# Altium PCB MotorBoard.PcbDoc (part 1 of 2)
Units mm, origin at the board's own origin, x right, y up, seen from the top; angles counter-clockwise.
Board outline 65.2 x 61.84 mm, 4 copper layers (Top Layer, Layer 1, Layer 2, Bottom Layer), stack 1.57 mm thick; 110 components, 72 nets, 437 pads, 238 vias.
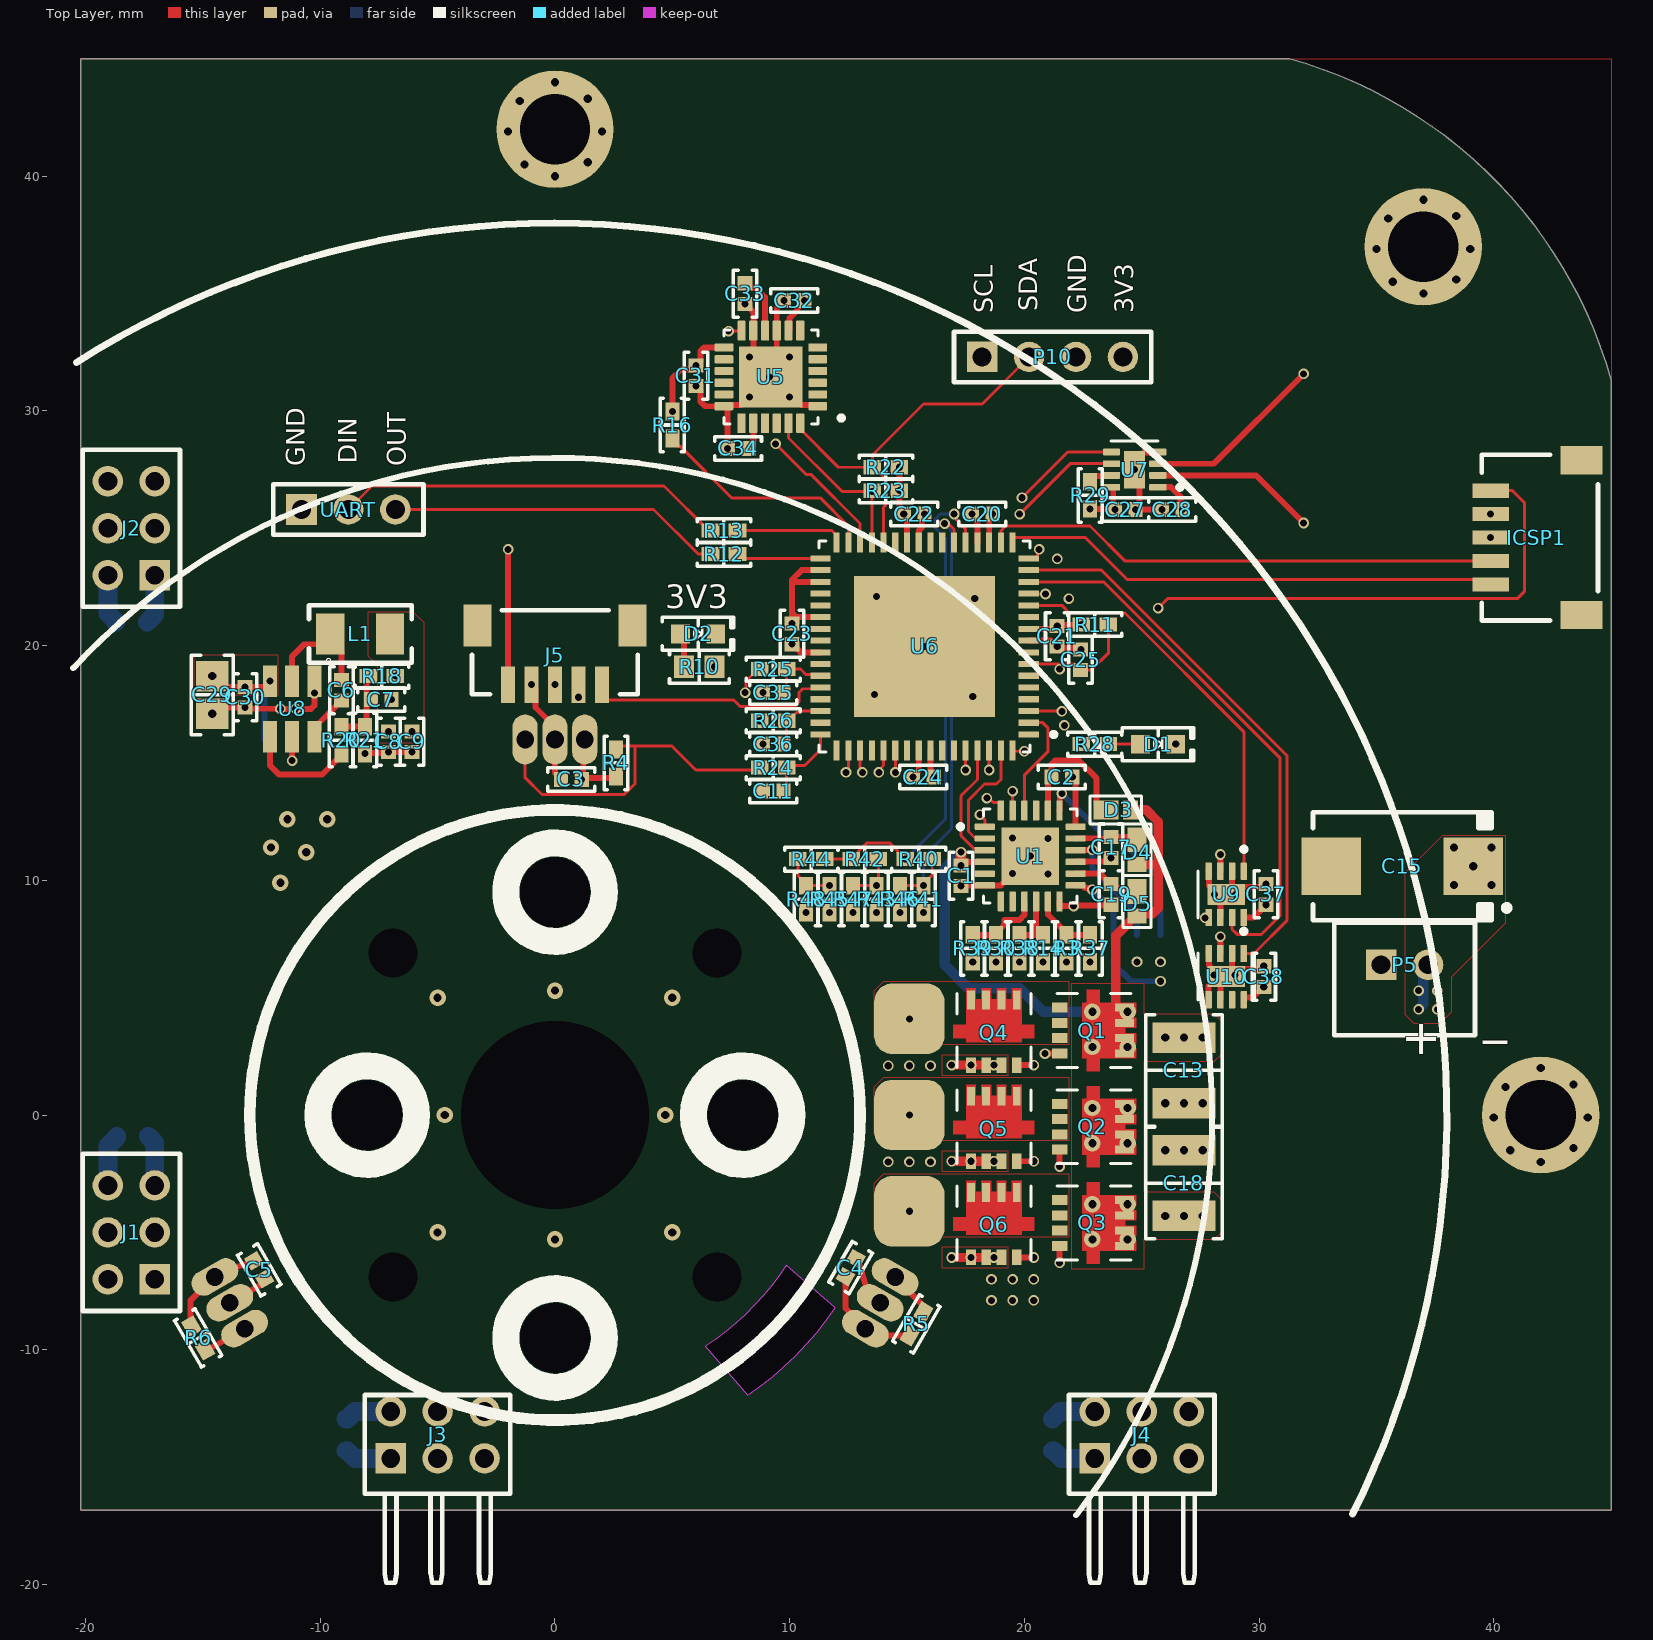
[diagram p0: Top Layer view]
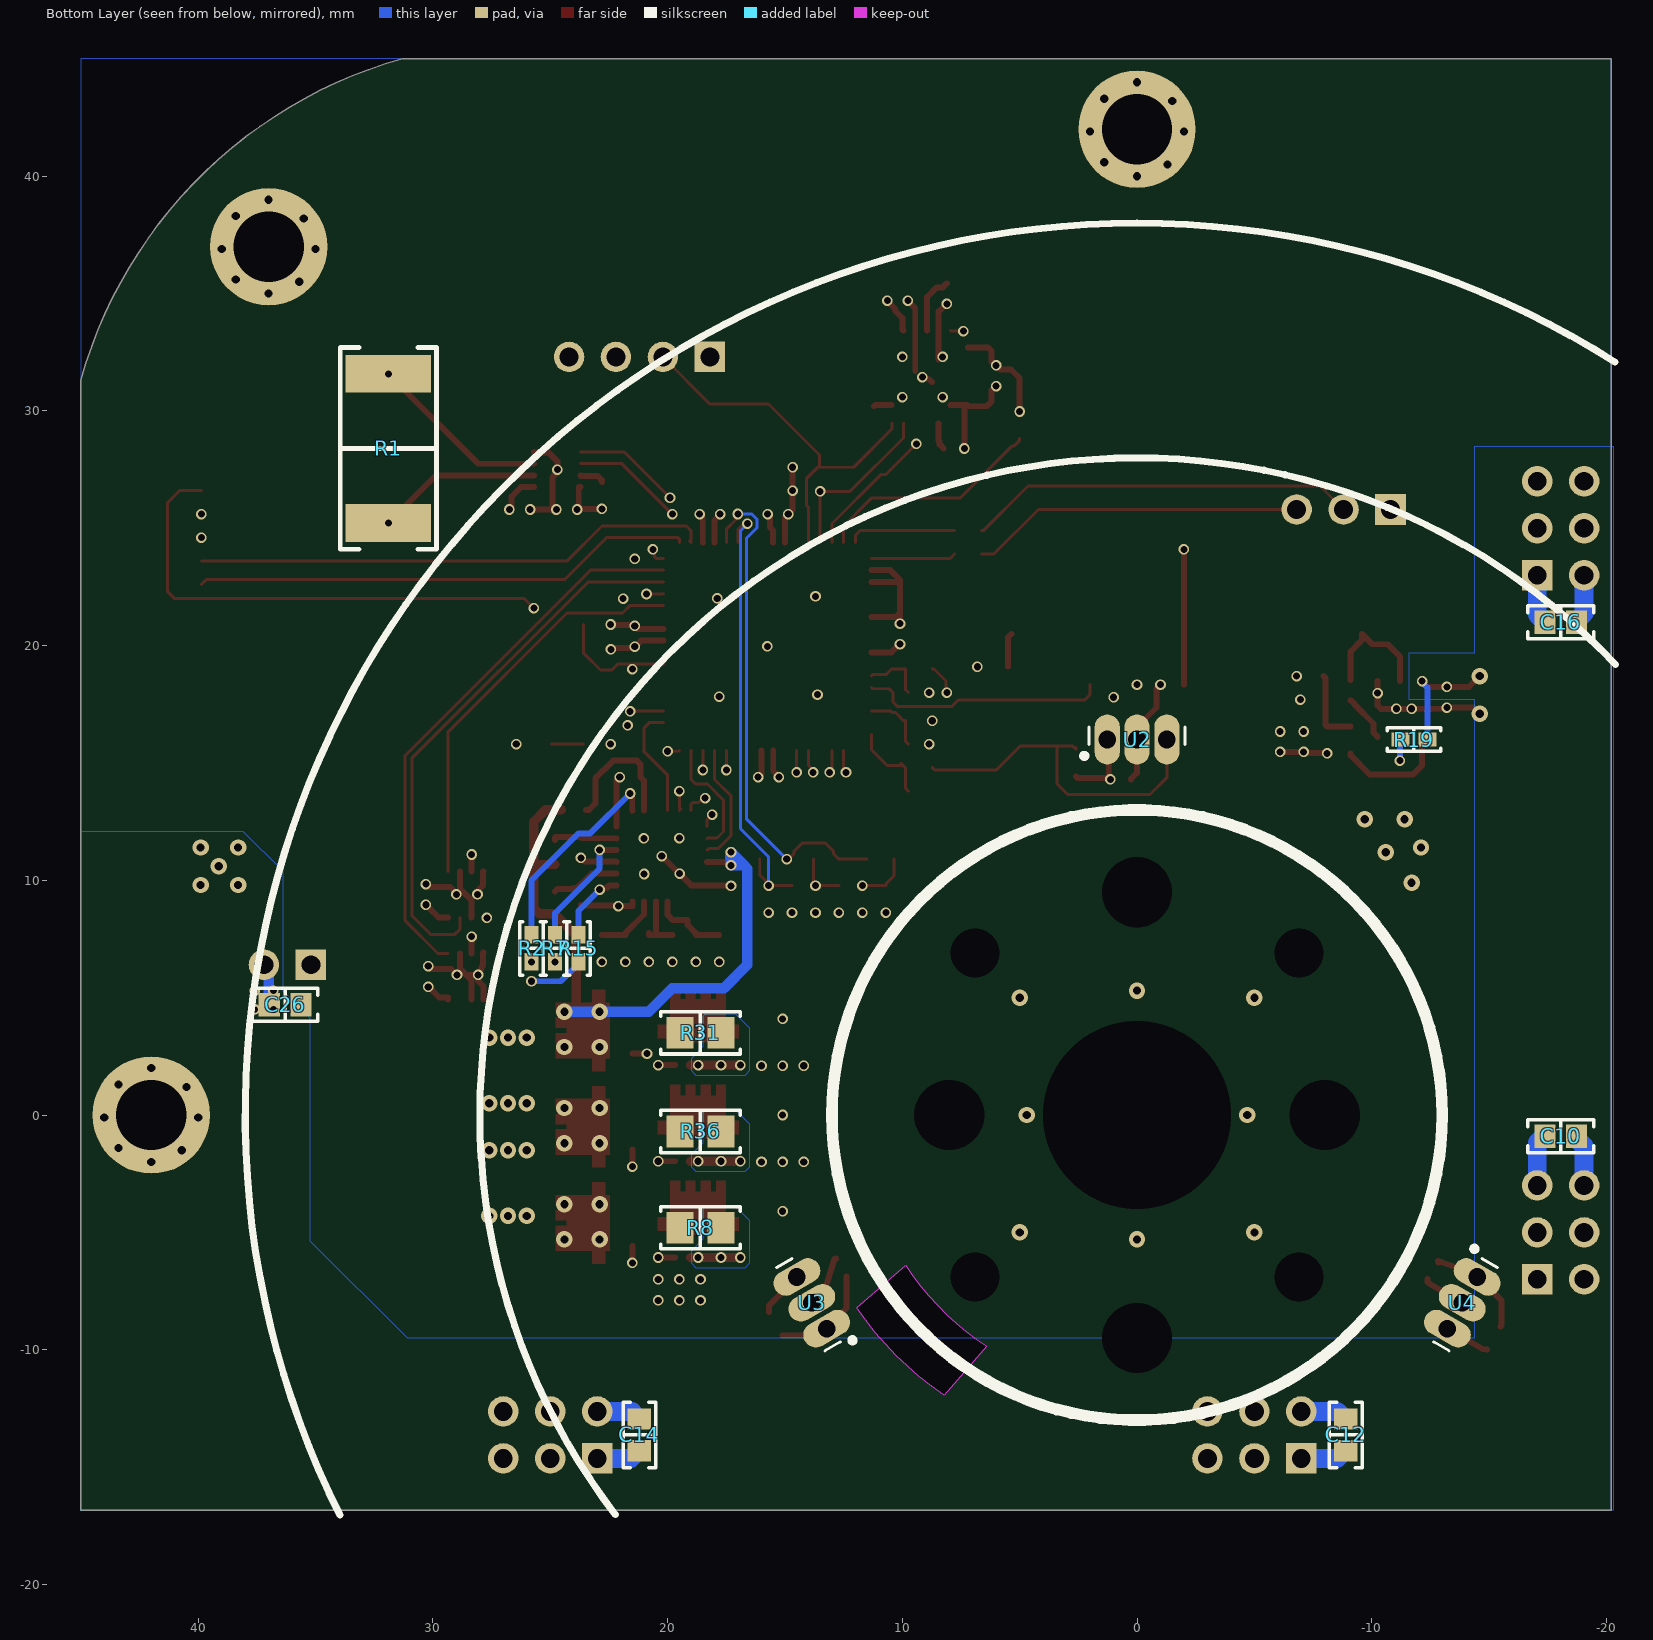
[diagram p1: Bottom Layer view, seen from below]
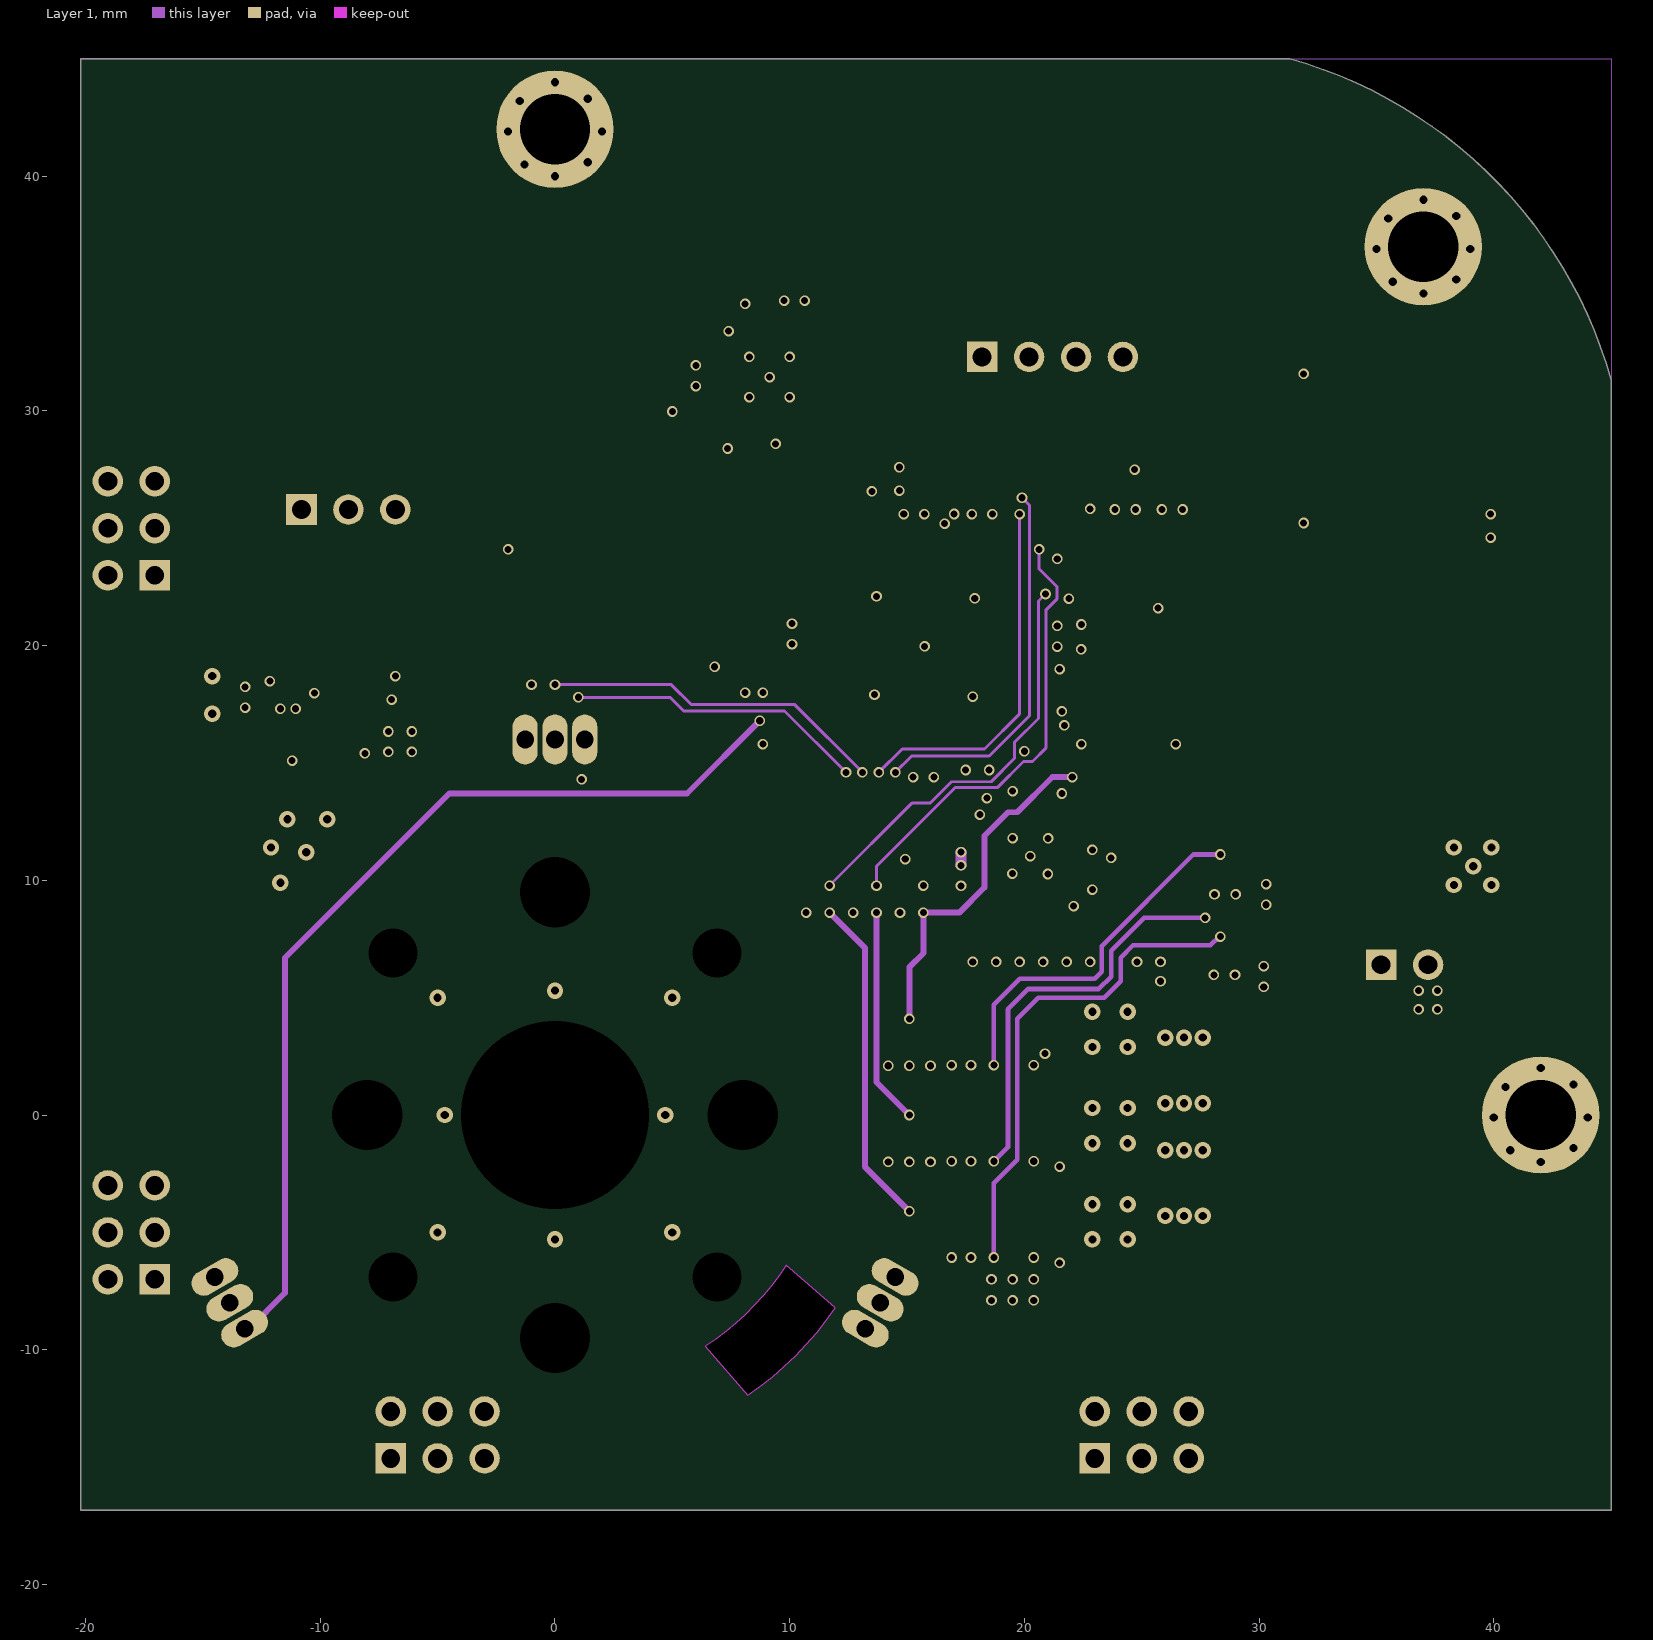
[diagram p2: Layer 1]
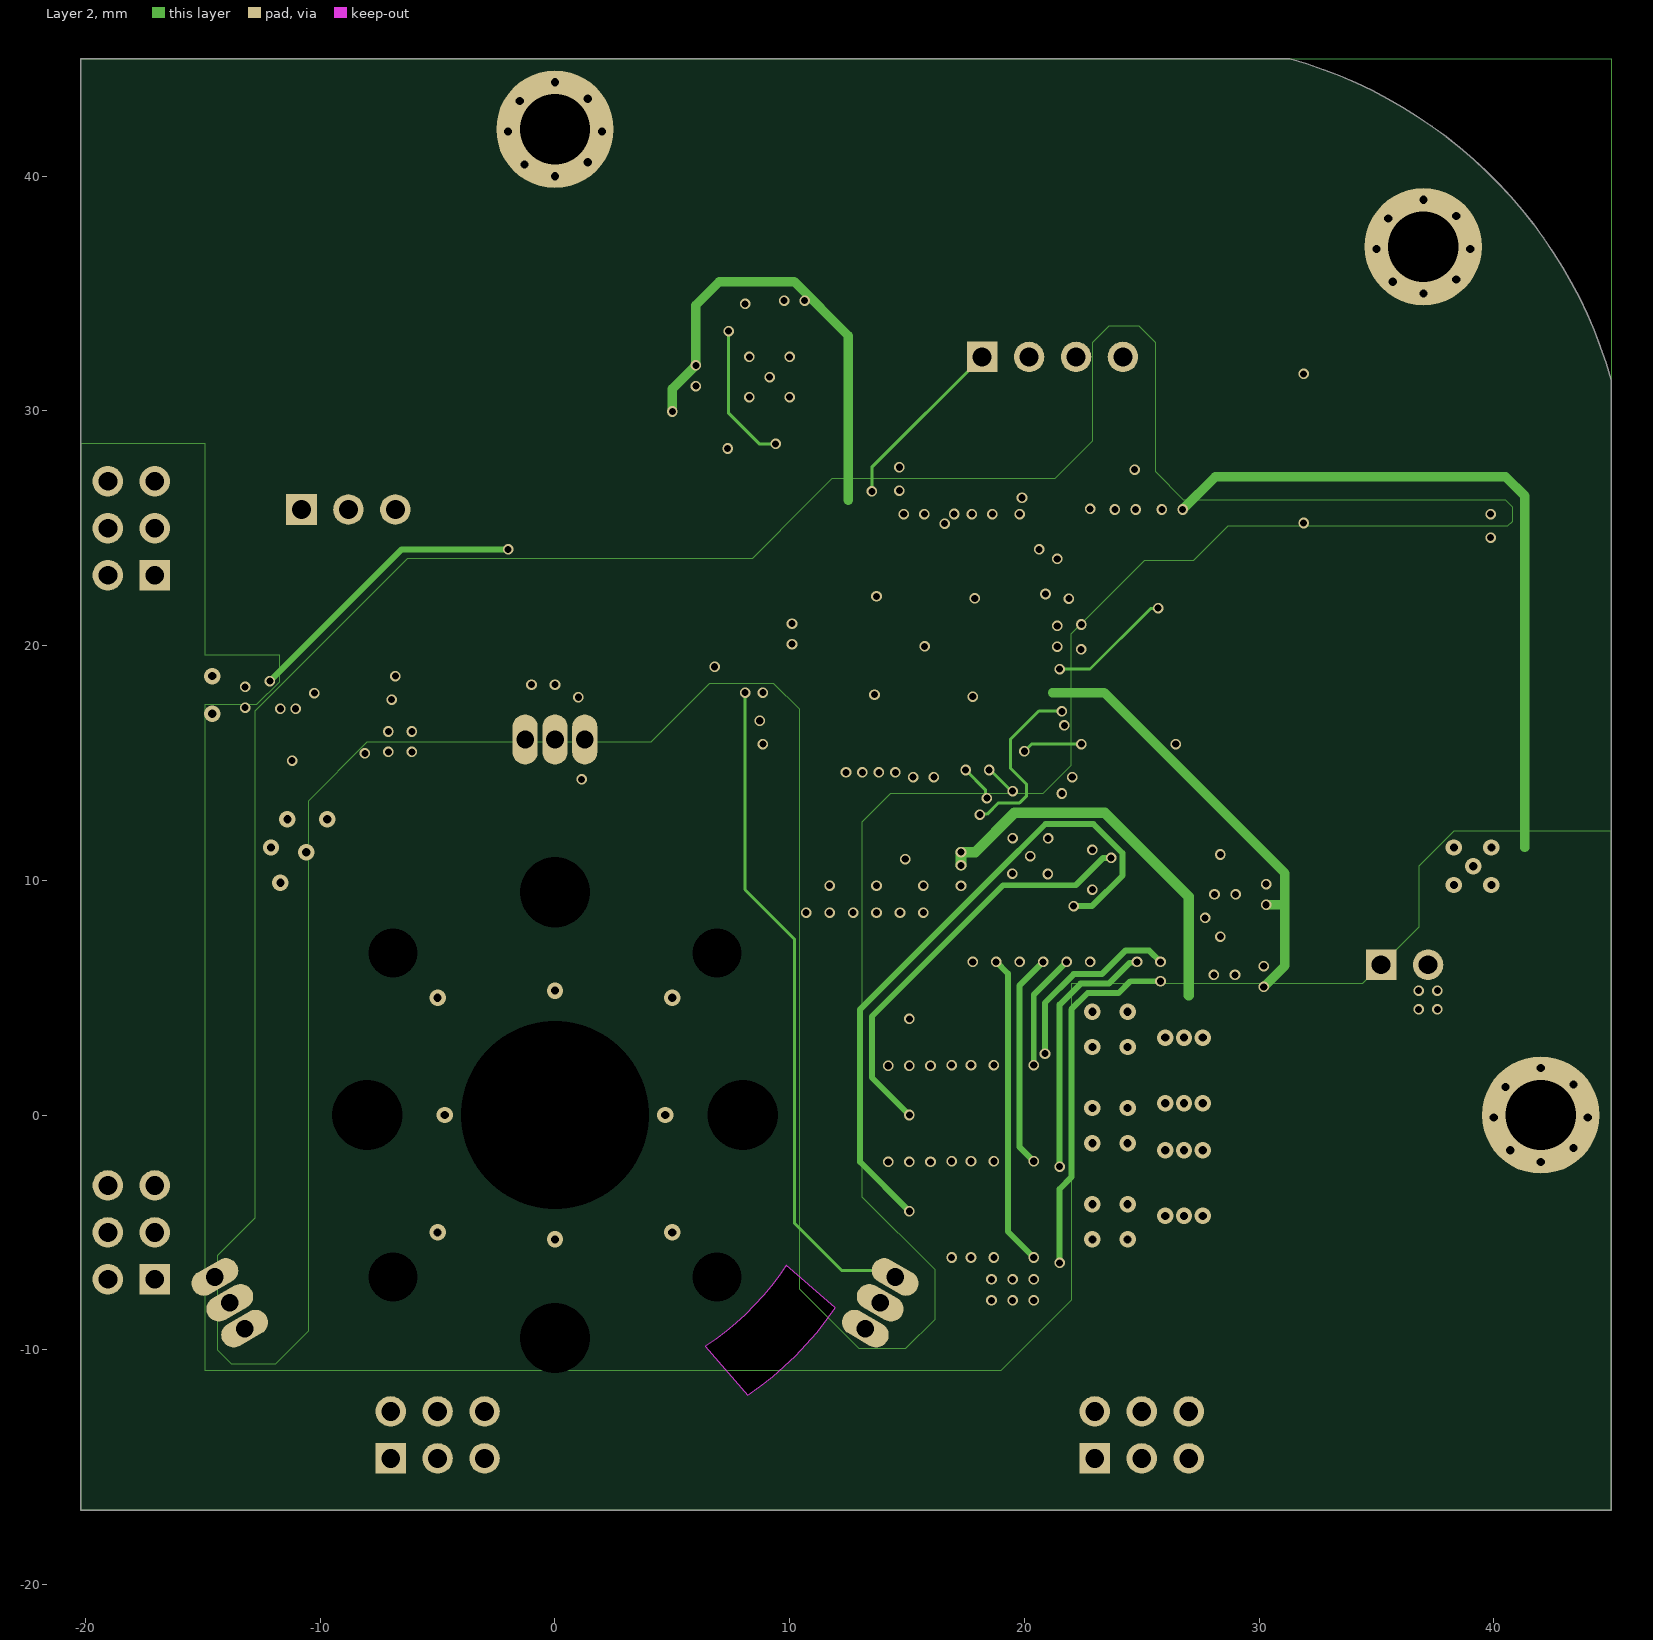
[diagram p3: Layer 2]

## Layer stack, top to bottom
Top Solder: solder mask 0.01, Solder Resist, Dk 3.5
Top Layer: signal copper 0.035
Dielectric 2: prepreg 0.2, PP-006, Dk 4.1
Layer 1: signal copper 0.0175
Dielectric 1: dielectric 1.065, FR-4, Dk 4.8
Layer 2: signal copper 0.0175
Dielectric 3: prepreg 0.2, PP-006, Dk 4.1
Bottom Layer: signal copper 0.035
Bottom Solder: solder mask 0.01, Solder Resist, Dk 3.5

## Board outline
-20.2,-16.84 -20.2,45 31.311,45 cw(c26,26) 45,31.311 45,-16.84
cut-out: 6.4,-9.854 8.213,-11.95 ccw(c0,0) 11.95,-8.213 9.854,-6.4 cw(c0,0)

## Design rules (kind name [scope] priority, off if disabled: settings)
BoardOutlineClearance [((OnLayer('Top Overlay') = False) AND (OnLayer('Bottom Overlay') = False))] p1: gap=0.127 ignorepadtopadclearanceinfootprint=FALSE
Clearance "PolyGon Pour Clearance" [InPolygon] p1: gap=0.127 ignorepadtopadclearanceinfootprint=FALSE
Clearance [All] p2: gap=0.127 ignorepadtopadclearanceinfootprint=FALSE
HoleSize [All] p1: absolutevalues=TRUE maxlimit=50 minlimit=0.2 maxpercent=80.000 minpercent=20.000
HoleToHoleClearance [All] p1: gap=0.54 allowstackedmicrovias=TRUE
MinimumSolderMaskSliver [All] p1: minsoldermaskwidth=0.01
PlaneClearance [All] p1: clearance=0.127
PlaneConnect [All] p1: pad.planeconnectstyle=Direct pad.reliefexpansion=0.508 pad.reliefentries=4 pad.reliefconductorwidth=0.254 pad.reliefairgap=0.254 via.planeconnectstyle=Relief via.reliefexpansion=0.508 via.reliefentries=4 via.reliefconductorwidth=0.254 via.reliefairgap=0.254
PolygonConnect PolygonRelief [IsPolygon and not (IsNamedPolygon('PolygonDirect'))] p1: thpad.connectstyle=Relief thpad.reliefconductorwidth=0.254 thpad.reliefentries=4 thpad.polygonreliefangle="90 Angle" thpad.airgapwidth=0.254 smdpad.connectstyle=Relief smdpad.reliefconductorwidth=0.254 smdpad.reliefentries=4 smdpad.polygonreliefangle="90 Angle" smdpad.airgapwidth=0.254 via.connectstyle=Direct via.reliefconductorwidth=0.254 via.reliefentries=4 via.polygonreliefangle="90 Angle" via.airgapwidth=0.254
PolygonConnect PolygonDirect [All] p2: connectstyle=Direct reliefconductorwidth=0.254 reliefentries=4 polygonreliefangle="90 Angle" airgapwidth=0.254
RoutingVias [All] p1: holewidth=0.35 width=0.7 viastyle="Through Hole" minholewidth=0.3 minwidth=0.45 maxholewidth=0.5 maxwidth=10
SolderMaskExpansion [All] p1: expansion=0.102 istentingtop=FALSE
Width [All] p1: maxlimit=2 minlimit=0.127 preferedwidth=0.254
25 further rules are at their usual default settings.

## Classes and differential pairs
component class U_Half_Bridges: C1 C2 C17 C19 C37 C38 D3 D4 D5 Q1 Q2 Q3 Q4 Q5 Q6 R2 R3 R7 R8 R14 R15 R30 R31 R36 R37 R38 R39 R40 R41 R42 R43 R44 R45 R46 R47 R48 U1 U9 U10
net class HALL_OUT[1..3]: HALL_OUT1 HALL_OUT2 HALL_OUT3

## Components (designator, comment, footprint, x,y, rotation, side; value= is the part's Value field where it differs from the comment)
C1 "0.1 µF" "CAP 0402_1005" 17.3,10.2 r90 top
C2 "0.1 µF" "CAP 0402_1005" 21.6,14.4 r0 top
C3 "0.1 µF" "CAP 0402_1005" 0.7,14.3 r180 top
C4 "0.1 µF" "CAP 0402_1005" 12.6,-6.5 r60 top
C5 "0.1 µF" "CAP 0402_1005" -12.6,-6.6 r300 top
C6 "1 µF" "CAP 0402_1005" -9.1,18.1 r90 top
C7 "47 pF" "CAP 0402_1005" -7.4,17.7 r0 top
C8 "1 µF" "CAP 0402_1005" -7.1,15.9 r90 top
C9 "22 µF" "CAP 0402_1005" -6.1,15.9 r90 top
C10 "0.1µF" "CAP 0603_1608" -18.05,-0.9 r180 bottom
C11 "0.01 µF" "CAP 0402_1005" 9.3,13.8 r180 top
C12 "0.1µF" "CAP 0603_1608" -8.9,-13.63 r270 bottom
C13 "100µF" "CAP 1210_3225 - 2.8MM" 26.8,1.9 r90 top
C14 "0.1µF" "CAP 0603_1608" 21.2,-13.63 r90 bottom
C15 "220µF" "CAP POL 2917_7343" 36.1,10.6 r180 top
C16 "0.1µF" "CAP 0603_1608" -18.05,21 r0 bottom
C17 "0.1 µF" "CAP 0402_1005" 23.7,11.4 r270 top
C18 "100µF" "CAP 1210_3225 - 2.8MM" 26.8,-2.9 r270 top
C19 "0.1 µF" "CAP 0402_1005" 23.7,9.4 r270 top
C20 "0.1 µF" "CAP 0402_1005" 18.2,25.6 r0 top
C21 "0.1 µF" "CAP 0402_1005" 21.4,20.4 r90 top
C22 "0.1 µF" "CAP 0402_1005" 15.3,25.6 r180 top
C23 "0.1 µF" "CAP 0402_1005" 10.1,20.5 r90 top
C24 "0.1 µF" "CAP 0402_1005" 15.7,14.4 r0 top
C25 "0.1 µF" "CAP 0402_1005" 22.4,19.4 r90 top
C26 "0.1µF" "CAP 0603_1608" 36.3,4.7 r180 bottom
C27 "0.1 µF" "CAP 0402_1005" 24.3,25.8 r180 top
C28 "0.1 µF" "CAP 0402_1005" 26.3,25.8 r180 top
C29 "22µF" "CAP 0805_2012" -14.6,17.9 r90 top
C30 "0.1 µF" "CAP 0402_1005" -13.2,17.8 r90 top
C31 "0.1 µF" "CAP 0402_1005" 6,31.5 r90 top
C32 "0.01 µF" "CAP 0402_1005" 10.2,34.7 r0 top
C33 "0.1 µF" "CAP 0402_1005" 8.1,35 r90 top
C34 "2200pF" "CAP 0402_1005" 7.8,28.4 r0 top
C35 "0.01 µF" "CAP 0402_1005" 9.3,18 r180 top
C36 "0.01 µF" "CAP 0402_1005" 9.3,15.8 r180 top
C37 "0.1 µF" "CAP 0402_1005" 30.3,9.4 r90 top
C38 "0.1 µF" "CAP 0402_1005" 30.2,5.9 r90 top
D1 "Blue" "LED 0603_1608 GREEN" 25.7,15.8 r0 top value=Green
D2 "Green" "LED 0603_1608 GREEN" 6.1,20.5 r0 top
D3 "Diode" "Diode DFN1608D-2 (SOD1608)" 23.9,13 r0 top
D4 "Diode" "Diode DFN1608D-2 (SOD1608)" 24.8,11.3 r270 top
D5 "Diode" "Diode DFN1608D-2 (SOD1608)" 24.8,9.1 r270 top
ICSP1 "SM05B-SRSS-TB(LF)(SN)" "JST SM05B-SRSS-TB" 41.9,24.6 r270 top
J1 "3x2 Female" 62000621821 -18.05,-5 r90 top
J2 "3x2 Female" 62000621821 -18.05,25 r90 top
J3 "3x2 Male" "2mm 3x2 Male Right - duplicate" -5,-13.63 r0 top
J4 "3x2 Male" "2mm 3x2 Male Right - duplicate" 25,-13.63 r0 top
J5 "BM05B-SRSS-TB(LF)(SN)" "JST BM05B-SRSS-TB" 0,19.6 r0 top
L1 "4.7µH" "IND 1008_2520" -8.3,20.5 r0 top
P5 "2 pin 2mm JST Male" "2pin - 2mm JST male" 36.2,6.4 r0 top
P10 "62000411121" 62000411121 21.2,32.3 r0 top
Q1 "NVTFS5C680NL" NVTFS015N04CTAG 22.97,3.6 r0 top
Q2 "NVTFS5C680NL" NVTFS015N04CTAG 22.97,-0.5 r0 top
Q3 "NVTFS5C680NL" NVTFS015N04CTAG 22.97,-4.6 r0 top
Q4 "NVTFS5C680NL" NVTFS015N04CTAG 18.7,3.6 r90 top
Q5 "NVTFS5C680NL" NVTFS015N04CTAG 18.7,-0.5 r90 top
Q6 "NVTFS5C680NL" NVTFS015N04CTAG 18.7,-4.6 r90 top
R1 "47 kOhms" "RES 2512_6432" 31.9,28.4 r90 bottom
R2 "22 Ohm" "RES 0402_1005" 25.8,7.1 r270 bottom
R3 "22 Ohm" "RES 0402_1005" 21.8,7.1 r270 top
R4 "4.7k" "RES 0402_1005" 2.6,15 r90 top
R5 "4.7k" "RES 0402_1005" 15.4,-8.9 r60 top
R6 "4.7k" "RES 0402_1005" -15.2,-9.5 r300 top
R7 "22 Ohm" "RES 0402_1005" 24.8,7.1 r270 bottom
R8 "15 mOhms" "RES 0805_2012" 18.6,-4.8 r180 bottom
R10 "1 kOhms" "RES 0603_1608" 6.15,19.1 r180 top
R11 "10k" "RES 0402_1005" 23,20.9 r180 top
R12 "22 Ohms" "RES 0402_1005" 7.2,23.9 r180 top
R13 "22 Ohms" "RES 0402_1005" 7.2,24.9 r180 top
R14 "22 Ohm" "RES 0402_1005" 20.8,7.1 r270 top
R15 "22 Ohm" "RES 0402_1005" 23.8,7.1 r270 bottom
R16 "10k" "RES 0402_1005" 5,29.4 r90 top
R18 "40.2k" "RES 0402_1005" -7.375,18.7 r180 top
R19 "10k" "RES 0402_1005" -11.8,16 r180 bottom
R20 "75k" "RES 0402_1005" -9.1,15.975 r270 top
R21 "13k" "RES 0402_1005" -8.1,15.975 r270 top
R22 "4.7k" "RES 0402_1005" 14.1,27.6 r180 top
R23 "4.7k" "RES 0402_1005" 14.1,26.6 r180 top
R24 "220 Ohms" "RES 0402_1005" 9.3,14.8 r0 top
R25 "220 Ohms" "RES 0402_1005" 9.3,19 r0 top
R26 "220 Ohms" "RES 0402_1005" 9.3,16.8 r0 top
R28 "1k" "RES 0402_1005" 23,15.8 r0 top
R29 "1k" "RES 0402_1005" 22.8,26.4 r90 top
R30 "22 Ohm" "RES 0402_1005" 18.8,7.1 r270 top
R31 "15 mOhms" "RES 0805_2012" 18.6,3.5 r180 bottom
R36 "15 mOhms" "RES 0805_2012" 18.6,-0.7 r180 bottom
R37 "10k" "RES 0402_1005" 22.8,7.1 r270 top
R38 "10k" "RES 0402_1005" 19.8,7.1 r270 top
R39 "10k" "RES 0402_1005" 17.8,7.1 r270 top
R40 "33 kOhms" "RES 0402_1005" 15.5,10.9 r0 top
R41 "33 kOhms" "RES 0402_1005" 15.7,9.2 r270 top
R42 "33 kOhms" "RES 0402_1005" 13.2,10.9 r0 top
R43 "33 kOhms" "RES 0402_1005" 13.7,9.2 r270 top
R44 "33 kOhms" "RES 0402_1005" 10.925,10.9 r180 top
R45 "33 kOhms" "RES 0402_1005" 11.7,9.2 r270 top
R46 "10 kOhms" "RES 0402_1005" 14.7,9.2 r90 top
R47 "10 kOhms" "RES 0402_1005" 12.7,9.2 r90 top
R48 "10 kOhms" "RES 0402_1005" 10.7,9.2 r90 top
U1 "FD6288Q" QFN50P400X400X100-25N 20.25,11.035 r0 top
U2 "Hall Effect" DRV5011ADLPG 0,16 r180 bottom
U3 "Hall Effect" DRV5011ADLPG 13.856,-8 r60 bottom
U4 "Hall Effect" DRV5011ADLPG -13.856,-8 r300 bottom
U5 "MPU6050" IC_MPU6050 9.2,31.45 r180 top
U6 "PIC32MK0512MCF064" QFN50P900X900X100-65N 15.75,19.965 r180 top
U7 "DRV8837CDSGR" SON50P200X200X80-9N 24.7,27.5 r180 top
U8 "AP65211A" TSOT-26-6 -11.2,17.3 r270 top
U9 "INA2180" SON50P200X200X80-9N 28.6,9.4 r270 top
U10 "INA2180" SON50P200X200X80-9N 28.6,5.9 r270 top
UART "3 pin 2mm JST Male" "3pin - 2mm header" -8.8,25.8 r0 top

## Footprints (in the part's own frame and the unit in brackets; to place one, negate y for a bottom-side part, rotate by r counter-clockwise, add the part's x,y. Pads: shape width x height; smd on the part's side, far side on the other; paste and mask are expansions set on the pad)
"2mm 3x2 Male Right - duplicate" [mm] "Socket Header, Pitch 2.00 mm, THT, Vertical, dual row, 6p"
  rect 1.3x1.3 hole 0.8: 1(-2,-1)
  round 1.3 hole 0.8: 2(-2,1) 3(0,-1) 4(0,1) 5(2,-1) 6(2,1)
  silkscreen extent -3.1,-6.3 3.1,1.7, body extent -3,-6.4 3,1.6, height 4.33
"2pin - 2mm JST male" [mm]
  rect 1.3x1.3 hole 0.8: 1(-1,0)
  round 1.3 hole 0.8: 2(1,0)
  silkscreen extent -3,-3 3,1.8, body extent -2.93,-2.97 2.93,1.7, height 5.89
"3pin - 2mm header" [mm]
  rect 1.3x1.3 hole 0.8: 1(-2,0)
  round 1.3 hole 0.8: 2(0,0) 3(2,0)
  silkscreen extent -3.2,-1.07 3.2,1.07, body extent -3.93,-2.97 3.93,1.7, height 5.89
62000411121 [mm] "Pin Header, pitch 2.00 mm, THT, Vertical, single row, 4p"
  rect 1.3x1.3 hole 0.8: 1(-3,0)
  round 1.3 hole 0.8: 2(-1,0) 3(1,0) 4(3,0)
  silkscreen extent -4.2,-1.07 4.2,1.07, body extent -4,-1 4,1, height 6.05
62000621821 [mm] "Socket Header, Pitch 2.00 mm, THT, Vertical, dual row, 6p"
  rect 1.3x1.3 hole 0.8: 1(-2,-1)
  round 1.3 hole 0.8: 2(-2,1) 3(0,-1) 4(0,1) 5(2,-1) 6(2,1)
  silkscreen extent -3.35,-2.07 3.35,2.07, body extent -3.3,-2 3.3,2, height 4.35
"CAP 0402_1005" [mm] "Chip Capacitor, 2-Leads, Body 1.02x0.51mm, IPC Medium Density"
  rect 0.6x0.64 smd: 1(-0.44,0) 2(0.44,0)
  silkscreen extent -1,-0.5 1,0.5, body extent -0.5,-0.26 0.5,0.26, height 0.52
"CAP 0603_1608" [mm] "Chip Capacitor, 2-Leads, Body 1.60x0.80mm, IPC Medium Density"
  rect 0.9x1 smd: 1(-0.675,0) 2(0.675,0)
  silkscreen extent -1.4,-0.7 1.4,0.7, body extent -0.8,-0.41 0.8,0.41, height 0.82
"CAP 0805_2012" [mm] "Chip Capacitor, 2-Leads, Body 2.00x1.20mm, IPC Medium Density"
  rect 1.3x1.4 smd: 1(-0.8,0) 2(0.8,0)
  silkscreen extent -1.7,-0.9 1.7,0.9, body extent -1,-0.64 1,0.64, height 1.26
"CAP 1210_3225 - 2.8MM" [mm] "Chip Capacitor, 2-Leads, Body 3.20x2.50mm, IPC Medium Density"
  rect 1.3x2.7 smd: 1(-1.4,0) 2(1.4,0)
  silkscreen extent -2.37,-1.63 2.37,1.63, body extent -1.6,-1.25 1.6,1.25, height 2.8
"CAP POL 2917_7343" [mm] "Molded Capacitor, 2-Leads, Body 7.30x4.30mm, IPC Medium Density"
  rect 2.55x2.45 smd: 1(-3.025,0) 2(3.025,0)
  silkscreen extent -4.58,-2.3 3.8,2.3, body extent -3.65,-2.15 3.65,2.15, height 4.1
"Diode DFN1608D-2 (SOD1608)" [mm]
  rect 1.05x0.8 smd: 1(-0.425,0)
  rect 0.65x0.8 smd: 2(0.625,0)
  silkscreen extent -1.1,-0.6 1.1,0.6, body extent -0.8,-0.4 0.8,0.4, height 0.4
DRV5011ADLPG [mm]
  oval 1.07x2.14 hole 0.75: 1(-1.27,0) 2(0,0) 3(1.27,0)
  silkscreen extent -2.32,-0.77 2.05,0.54, body extent -2,-0.98 2,0.54, height 11
IC_MPU6050 [mm]
  rrect25% 0.8x0.35 smd: 1(-2,1.25) 2(-2,0.75) 3(-2,0.25) 4(-2,-0.25) 5(-2,-0.75) 6(-2,-1.25) 13(2,-1.25) 14(2,-0.75) 15(2,-0.25) 16(2,0.25) 17(2,0.75) 18(2,1.25)
  rrect25% 0.35x0.85 smd: 7(-1.25,-1.975) 8(-0.75,-1.975) 9(-0.25,-1.975) 10(0.25,-1.975) 11(0.75,-1.975) 12(1.25,-1.975) 19(1.25,1.975) 20(0.75,1.975) 21(0.25,1.975) 22(-0.25,1.975) 23(-0.75,1.975) 24(-1.25,1.975)
  rect 2.7x2.6 smd paste-2: 25(0,0)
  silkscreen extent -3.1,-2 2,2, body extent -2,-2 2,2, height 0.93
"IND 1008_2520" [mm] "Chip Inductance, 2-leads, Body 2.5x2.1mm, IPC Medium Density"
  rect 1.2x1.75 smd: 1(-1.275,0) 2(1.275,0)
  silkscreen extent -2.18,-1.22 2.2,1.22, body extent -1.3,-1.05 1.3,1.05, height 1
"JST BM05B-SRSS-TB" [mm] "1.0mm pitch/Disconnectable Crimp style connector"
  rect 0.6x1.55 smd: 1(-2,-1.262) 2(-1,-1.262) 3(0,-1.262) 4(1,-1.262) 5(2,-1.262)
  rect 1.2x1.8 smd: M(-3.3,1.262) M(3.3,1.262)
  silkscreen extent -3.53,-1.68 3.53,1.91, body extent -3.5,-1.69 3.5,1.91, height 4.32
"JST SM05B-SRSS-TB" [mm] "1.0mm pitch/Disconnectable Crimp style connector"
  rect 0.6x1.55 smd: 1(-2,-2.032) 2(-1,-2.032) 3(0,-2.032) 4(1,-2.032) 5(2,-2.032)
  rect 1.2x1.8 smd: M(-3.3,1.843) M(3.3,1.843)
  silkscreen extent -3.53,-2.41 3.53,2.54, body extent -3.5,-2.38 3.5,2.57, height 2.95
"LED 0603_1608 GREEN" [mm] "Chip Diode, 2-Leads, Body 1.60x0.80mm, IPC Medium Density"
  rect 0.8x0.8 smd: 1(-0.75,0) 2(0.75,0)
  silkscreen extent -1.52,-0.7 1.52,0.7, body extent -0.8,-0.4 0.8,0.4, height 0.53
NVTFS015N04CTAG [mm]
  rect 0.66x0.42 smd: 1(-1.47,0.975) 2(-1.47,0.325) 3(-1.47,-0.325) 4(-1.47,-0.975)
  rect 0.8x0.34 smd: 5(1.3,-0.975) 6(1.3,-0.325) 7(1.3,0.325) 8(1.3,0.975)
  Top Layer region: -0.5,-1.185 -0.5,1.185 -0.32,1.185 -0.32,1.73 0.25,1.73 0.25,1.185 1.8,1.185 1.8,0.765 1.33,0.765 1.33,0.535 1.8,0.535 1.8,0.115 1.33,0.115 1.33,-0.115 1.8,-0.115 1.8,-0.535 1.33,-0.535 1.33,-0.765 1.8,-0.765 1.8,-1.185 0.25,-1.185 0.25,-1.73 -0.32,-1.73 -0.32,-1.185
  silkscreen extent -1.58,-1.58 1.58,1.58, body extent -1.7,-1.7 1.7,1.7, height 1.1
QFN50P400X400X100-25N [mm]
  rrect25% 0.86x0.27 smd: 1(-1.935,1.25) 2(-1.935,0.75) 3(-1.935,0.25) 4(-1.935,-0.25) 5(-1.935,-0.75) 6(-1.935,-1.25) 13(1.935,-1.25) 14(1.935,-0.75) 15(1.935,-0.25) 16(1.935,0.25) 17(1.935,0.75) 18(1.935,1.25)
  rrect25% 0.27x0.86 smd: 7(-1.25,-1.935) 8(-0.75,-1.935) 9(-0.25,-1.935) 10(0.25,-1.935) 11(0.75,-1.935) 12(1.25,-1.935) 19(1.25,1.935) 20(0.75,1.935) 21(0.25,1.935) 22(-0.25,1.935) 23(-0.75,1.935) 24(-1.25,1.935)
  rect 2.45x2.45 smd paste-0.45: 25(0,0)
  silkscreen extent -3.07,-2 2,2, body extent -2,-2 2,2, height 1
QFN50P900X900X100-65N [mm]
  rect 0.86x0.26 smd: 1(-4.435,3.75) 2(-4.435,3.25) 3(-4.435,2.75) 4(-4.435,2.25) 5(-4.435,1.75) 6(-4.435,1.25) 7(-4.435,0.75) 8(-4.435,0.25) 9(-4.435,-0.25) 10(-4.435,-0.75) 11(-4.435,-1.25) 12(-4.435,-1.75) 13(-4.435,-2.25) 14(-4.435,-2.75) 15(-4.435,-3.25) 16(-4.435,-3.75) 33(4.435,-3.75) 34(4.435,-3.25) 35(4.435,-2.75) 36(4.435,-2.25) 37(4.435,-1.75) 38(4.435,-1.25) 39(4.435,-0.75) 40(4.435,-0.25) 41(4.435,0.25) 42(4.435,0.75) 43(4.435,1.25) 44(4.435,1.75) 45(4.435,2.25) 46(4.435,2.75) 47(4.435,3.25) 48(4.435,3.75)
  rect 0.26x0.86 smd: 17(-3.75,-4.435) 18(-3.25,-4.435) 19(-2.75,-4.435) 20(-2.25,-4.435) 21(-1.75,-4.435) 22(-1.25,-4.435) 23(-0.75,-4.435) 24(-0.25,-4.435) 25(0.25,-4.435) 26(0.75,-4.435) 27(1.25,-4.435) 28(1.75,-4.435) 29(2.25,-4.435) 30(2.75,-4.435) 31(3.25,-4.435) 32(3.75,-4.435) 49(3.75,4.435) 50(3.25,4.435) 51(2.75,4.435) 52(2.25,4.435) 53(1.75,4.435) 54(1.25,4.435) 55(0.75,4.435) 56(0.25,4.435) 57(-0.25,4.435) 58(-0.75,4.435) 59(-1.25,4.435) 60(-1.75,4.435) 61(-2.25,4.435) 62(-2.75,4.435) 63(-3.25,4.435) 64(-3.75,4.435)
  rect 6x6 smd: 65(0,0)
  silkscreen extent -5.6,-4.5 4.5,4.5, body extent -4.52,-4.52 4.52,4.52, height 0.9
"RES 0402_1005" [mm] "Chip Resistor, 2-Leads, Body 1.0x0.5mm, IPC Medium Density"
  rect 0.75x0.6 smd: 1(-0.575,0) 2(0.575,0)
  silkscreen extent -1.14,-0.51 1.14,0.51, body extent -0.5,-0.25 0.5,0.25, height 0.35
"RES 0603_1608" [mm] "Chip Resistor, 2-Leads, Body 1.60x0.80mm, IPC Medium Density"
  rect 0.85x0.95 smd: 1(-0.65,0) 2(0.65,0)
  silkscreen extent -1.27,-0.7 1.27,0.7, body extent -0.8,-0.4 0.8,0.4, height 0.45
"RES 0805_2012" [mm] "Chip Resistor, 2-Leads, Body 2.00x1.25mm, IPC Medium Density"
  rect 1.15x1.35 smd: 1(-0.875,0) 2(0.875,0)
  silkscreen extent -1.7,-0.9 1.7,0.9, body extent -1,-0.62 1,0.63, height 0.6
"RES 2512_6432" [mm] "Chip Resistor, 2-Leads, Body 6.30x3.15mm, IPC Medium Density"
  rect 1.6x3.65 smd: 1(-3.175,0) 2(3.175,0)
  silkscreen extent -4.3,-2.05 4.3,2.05, body extent -3.15,-1.58 3.15,1.57, height 0.7
SON50P200X200X80-9N [mm]
  rrect25% 0.74x0.28 smd: 1(-0.985,0.75) 2(-0.985,0.25) 3(-0.985,-0.25) 4(-0.985,-0.75) 5(0.985,-0.75) 6(0.985,-0.25) 7(0.985,0.25) 8(0.985,0.75)
  rect 0.9x1.6 smd paste-2: 9(0,0)
  silkscreen extent -2.02,-1.21 1,1.21, body extent -1,-1 1,1, height 0.75
TSOT-26-6 [mm]
  rect 1.35x0.6 smd: 1(-1.185,0.95) 2(-1.185,0) 3(-1.185,-0.95) 4(1.185,-0.95) 5(1.185,0) 6(1.185,0.95)
  silkscreen extent -2.15,1.45 -1.95,1.65, body extent -1.2,-1.45 1.2,1.45, height 1

## Part data
C1 C2 C3 C4 C5 C17 C19 C20 C21 C22 C23 C24 C25 C27 C28 C30 C31 C33 C37 C38: library part C0402C104K4RACAUTO, "CAP CER 0.1UF 16V X7R 0402", Device Package="0402 (1005 Metric)", Manufacturer=KEMET, Operating Temperature="-55°C ~ 125°C", Ratings=AEC-Q200, Supplier Part Number 1=399-6828-1-ND, Temperature Coefficient=X7R, Tolerance=±10%, Voltage - Rated=16V, Applications="Automotive, Bypass, Decoupling", Capacitance="0.1 µF", ComponentLink1Description=Datasheet, ComponentLink1URL=https://api.kemet.com/component-edge/download/specsheet/C0402C104K4RACAUTO.pdf, ComponentLink2Description="DigiKey Link", ComponentLink2URL=https://www.digikey.com/en/products/detail/kemet/C0402C104K4RACAUTO/3314827, LastUpdated="8/14/2022 9:05:51 PM", Lifecycle Status=Active, Minimum Order=1, Mounting Type="Surface Mount, MLCC", Package / Case="0402 (1005 Metric)", Packaging=TapeAndReel, Part Number=C0402C104K4RACAUTO, Part Status=Active, PartId=3024, Price=0.01, Series="SMD Auto X7R", Size / Dimension="0.039\" L x 0.020\" W (1.00mm x 0.50mm)", Supplier 1=DigiKey, Thickness (Max)="0.022\" (0.55mm)"
C6 C7 C8 C9 C11 C32 C34 C35 C36: library part C0402C104K4RACAUTO, "CAP CER 0.1UF 16V X7R 0402", Capacitance="0.1 µF", Device Package="0402 (1005 Metric)", Manufacturer=KEMET, Operating Temperature="-55°C ~ 125°C", Ratings=AEC-Q200, Supplier Part Number 1=399-6828-1-ND, Temperature Coefficient=X7R, Tolerance=±10%, Voltage - Rated=16V, Applications="Automotive, Bypass, Decoupling", ComponentLink1Description=Datasheet, ComponentLink1URL=https://api.kemet.com/component-edge/download/specsheet/C0402C104K4RACAUTO.pdf, ComponentLink2Description="DigiKey Link", ComponentLink2URL=https://www.digikey.com/en/products/detail/kemet/C0402C104K4RACAUTO/3314827, LastUpdated="8/14/2022 9:05:51 PM", Lifecycle Status=Active, Minimum Order=1, Mounting Type="Surface Mount, MLCC", Package / Case="0402 (1005 Metric)", Packaging=TapeAndReel, Part Number=C0402C104K4RACAUTO, Part Status=Active, PartId=3024, Price=0.01, Series="SMD Auto X7R", Size / Dimension="0.039\" L x 0.020\" W (1.00mm x 0.50mm)", Supplier 1=DigiKey, Thickness (Max)="0.022\" (0.55mm)"
C10 C12 C14 C16 C26: library part GCG188R92A104KA03D, "CAP CER 0.1UF 100V 0603 EPOXY", Device Package="0603 (1608 Metric)", Manufacturer="Murata Electronics", Operating Temperature="-55°C ~ 150°C", Ratings=AEC-Q200, Supplier Part Number 1=490-18197-1-ND, Temperature Coefficient=X8R, Tolerance=±10%, Voltage - Rated=100V, Applications=Automotive, Capacitance=0.1µF, ComponentLink1Description=Datasheet, ComponentLink1URL=https://search.murata.co.jp/Ceramy/image/img/A01X/G101/ENG/GCG188R92A104KA03-01.pdf, ComponentLink2Description="DigiKey Link", ComponentLink2URL=http://digikey.com/product-detail/en/murata-electronics/GCG188R92A104KA03D/490-18197-1-ND/9867926, Features="Epoxy Mountable", LastUpdated="21-Jan-20 12:01:59 AM", Lifecycle Status=Active, Minimum Order=1, Mounting Type="Surface Mount, MLCC, Epoxy", Package / Case="0603 (1608 Metric)", Packaging=TapeAndReel, Part Number=GCG188R92A104KA03D, Part Status=Active, PartId=9025, Price=0.07, Series=GCG, Size / Dimension="0.063\" L x 0.031\" W (1.60mm x 0.80mm)", Supplier 1=DigiKey, Thickness (Max)="0.035\" (0.90mm)"
C13 C18: library part EMK325ABJ107MM-P, "CAP CER 100UF 16V X5R 1210", Device Package="1210 (3225 Metric)", Manufacturer="Taiyo Yuden", Operating Temperature="-55°C ~ 85°C", Supplier Part Number 1=587-5426-1-ND, Temperature Coefficient=X5R, Tolerance=±20%, Voltage - Rated=16V, Applications="General Purpose", Capacitance=100µF, ComponentLink1Description=Datasheet, ComponentLink1URL="https://ds.yuden.co.jp/TYCOMPAS/ut/detail?pn=EMK325ABJ107MM-P &u=M", ComponentLink2Description="DigiKey Link", ComponentLink2URL=http://digikey.com/product-detail/en/taiyo-yuden/EMK325ABJ107MM-P/587-5426-1-ND/7067102, LastUpdated="21-Jan-20 12:30:21 AM", Lifecycle Status=Active, Minimum Order=1, Mounting Type="Surface Mount, MLCC", Package / Case="1210 (3225 Metric)", Packaging=TapeAndReel, Part Number=EMK325ABJ107MM-P, Part Status=Active, PartId=24141, Price=0.71, Series=M, Size / Dimension="0.126\" L x 0.098\" W (3.20mm x 2.50mm)", Supplier 1=DigiKey, Thickness (Max)="0.110\" (2.80mm)"
C15: library part T510X227K016ATE040, "CAP TANT 220UF 10% 16V 2917", Device Package="2917 (7343 Metric)", ESR (Equivalent Series Resistance)=40mOhm, Lifetime @ Temp.="2000 Hrs @ 85°C", Manufacturer=KEMET, Manufacturer Size Code=X, Operating Temperature="-55°C ~ 125°C", Supplier Part Number 1=399-4805-1-ND, Tolerance=±10%, Voltage - Rated=16V, Capacitance=220µF, ComponentLink1Description=Datasheet, ComponentLink1URL=https://api.kemet.com/component-edge/download/datasheet/T510X227K016ATE040.pdf, ComponentLink2Description="DigiKey Link", ComponentLink2URL=http://digikey.com/product-detail/en/kemet/T510X227K016ATE040/399-4805-1-ND/1085524, Features="General Purpose", Height - Seated (Max)="0.169\" (4.30mm)", LastUpdated="30-Aug-20 8:55:47 PM", Lifecycle Status=Active, Minimum Order=1, Mounting Type="Surface Mount", Package / Case="2917 (7343 Metric)", Packaging=TapeAndReel, Part Number=T510X227K016ATE040, Part Status=Active, PartId=1966, Price=4.46, Series=T510, Size / Dimension="0.287\" L x 0.169\" W (7.30mm x 4.30mm)", Supplier 1=DigiKey, Type=Molded
C29: library part C2012X7S1E106K125AC, "CAP CER 10UF 25V X7S 0805", Capacitance=10µF, Device Package="0805 (2012 Metric)", Manufacturer="TDK Corporation", Operating Temperature="-55°C ~ 125°C", Supplier Part Number 1=445-181600-1-ND, Temperature Coefficient=X7S, Tolerance=±10%, Voltage - Rated=25V, Applications="General Purpose", ComponentLink1Description=Datasheet, ComponentLink1URL=https://product.tdk.com/en/search/capacitor/ceramic/mlcc/info?part_no=C2012X7S1E106K125AC?ref_disty=digikey, ComponentLink2Description="DigiKey Link", ComponentLink2URL=http://digikey.com/product-detail/en/tdk-corporation/C2012X7S1E106K125AC/445-181600-1-ND/9991478, Features="Low ESL", LastUpdated="21-Jan-20 12:03:04 AM", Lifecycle Status=Active, Minimum Order=1, Mounting Type="Surface Mount, MLCC", Package / Case="0805 (2012 Metric)", Packaging=TapeAndReel, Part Number=C2012X7S1E106K125AC, Part Status=Active, PartId=3339, Price=0.15, Series=C, Size / Dimension="0.079\" L x 0.049\" W (2.00mm x 1.25mm)", Supplier 1=DigiKey, Thickness (Max)="0.057\" (1.45mm)"
D1: library part XZCDGK53W-8VF, "Blue LED", Color=Green, Current - Test=2mA, Device Package="0603 (1608 Metric)", Lens Color=Colorless, Manufacturer=SunLED, Millicandela Rating=417mcd, Supplier Device Package=2-SMD, Supplier Part Number 1=1497-XZCDGK53W-8VFCT-ND, Voltage - Forward (Vf) (Typ)=2.65V, ComponentLink1Description=Datasheet, ComponentLink1URL=https://www.sunledusa.com/products/spec/XZCDGK53W-8VF.pdf, ComponentLink2Description="DigiKey Link", ComponentLink2URL=http://digikey.com/product-detail/en/sunled/XZCDGK53W-8VF/1497-XZCDGK53W-8VFCT-ND/10449792, Configuration=Independent, Height (Max)=1.10mm, LastUpdated="21-Jan-20 3:12:09 AM", Lens Size="0.35mm Dia", Lens Style="Round with Domed Top", Lens Transparency=Clear, Lifecycle Status=Active, Minimum Order=1, Mounting Type="Surface Mount", Package / Case="0603 (1608 Metric)", Packaging=Unknown, Part Number=XZCDGK53W-8VF, Part Status=Active, PartId=938, Price=0.18, Series="Ultra Low Current", Size / Dimension="1.60mm L x 0.80mm W", Supplier 1=DigiKey, Viewing Angle=60°, Wavelength - Dominant=525nm, Wavelength - Peak=515nm
D2: library part XZCDGK53W-8VF, "1.6X0.8MM LC GREEN PIXSOLED DOME", Current - Test=2mA, Device Package="0603 (1608 Metric)", Lens Color=Colorless, Manufacturer=SunLED, Millicandela Rating=417mcd, Supplier Device Package=2-SMD, Supplier Part Number 1=1497-XZCDGK53W-8VFCT-ND, Voltage - Forward (Vf) (Typ)=2.65V, Color=Green, ComponentLink1Description=Datasheet, ComponentLink1URL=https://www.sunledusa.com/products/spec/XZCDGK53W-8VF.pdf, ComponentLink2Description="DigiKey Link", ComponentLink2URL=http://digikey.com/product-detail/en/sunled/XZCDGK53W-8VF/1497-XZCDGK53W-8VFCT-ND/10449792, Configuration=Independent, Height (Max)=1.10mm, LastUpdated="21-Jan-20 3:12:09 AM", Lens Size="0.35mm Dia", Lens Style="Round with Domed Top", Lens Transparency=Clear, Lifecycle Status=Active, Minimum Order=1, Mounting Type="Surface Mount", Package / Case="0603 (1608 Metric)", Packaging=Unknown, Part Number=XZCDGK53W-8VF, Part Status=Active, PartId=938, Price=0.18, Series="Ultra Low Current", Size / Dimension="1.60mm L x 0.80mm W", Supplier 1=DigiKey, Viewing Angle=60°, Wavelength - Dominant=525nm, Wavelength - Peak=515nm
D3 D4 D5: "DFN1608D-2 (SOD1608)", Digikey Part Number=CLV1L-FKB-CHMMQEHBB7673673-ND, Manufacturer=Cree, Mouser Part Number=941-CLV1LFKBC7673673, Package=LED_3MM2X2MM8, Temperature="-40°C to +100°C", Temperature Range High=+100°C, Temperature Range Low=-40°C, ComponentLink1Description=Upverter, ComponentLink1URL=https://upverter.com/upn/revision/9d0b31f7b1982705/, ComponentLink2Description=Datasheet, ComponentLink2URL=http://www.cree.com/~/media/Files/Cree/LED-Components-and-Modules/HB/Data-Sheets/CLV1L-FKB-1238.pdf, Digikey Description="DIODE LED RGB DIFFUSED 4LCC SMD", Lead Free=yes, Price=0.203999996142, RoHS=TRUE, Supplier 1=Digi-Key, Supplier 2=Mouser, Supplier Part Number 1=CLV1L-FKB-CHMMQEHBB7673673-ND, Supplier Part Number 2=941-CLV1LFKBC7673673
ICSP1: "CONN HEADER SMD R/A 5POS 1MM", Current Rating (Amps)=0.7A, Insulation Color=Natural, Manufacturer="JST Sales America Inc.", Material Flammability Rating="UL94 V-0", Operating Temperature="-25°C ~ 85°C", Supplier Part Number 1=455-1805-1-ND, Voltage Rating=50V, ComponentLink1Description=Datasheet, ComponentLink1URL=http://www.jst-mfg.com/product/pdf/eng/eSH.pdf, ComponentLink2Description="DigiKey Link", ComponentLink2URL=http://digikey.com/product-detail/en/jst-sales-america-inc/SM05B-SRSS-TB-LF-SN/455-1805-1-ND/926876, Connector Type=Header, Contact Finish - Mating=Tin, Contact Finish - Post=Tin, Contact Material="Copper Alloy", Contact Shape=Square, Contact Type="Male Pin", Fastening Type=Push-Pull, Features="Solder Retention", Insulation Height="0.114\" (2.90mm)", Insulation Material="Polyamide (PA), Nylon", LastUpdated="1/12/2020 11:42:04 PM", Lifecycle Status=Active, Minimum Order=1, Mounting Type="Surface Mount, Right Angle", Number of Positions=5, Number of Positions Loaded=All, Number of Rows=1, Packaging=TapeAndReel, Part Number=SM05B-SRSS-TB(LF)(SN), Part Status=Active, PartId=63, Pitch - Mating="0.039\" (1.00mm)", Price=0.32, Series=SR, Shrouding="Shrouded - 4 Wall", Style="Board to Cable/Wire", Supplier 1=DigiKey, Termination=Solder
J1 J2: library part 62000621821, "WR-PHD Socket Header, THT, pitch 2mm, Dual Row, Vertical, 6p", Contact Resistance=20mOhm, Manufacturer="Wurth Elektronik", Operating Temperature="-40 to +105degC", Rated Current=2A, Withstanding Voltage=500VAC, Working Voltage=250VAC, ComponentLink1Description=Manufacturer, ComponentLink1URL=http://www.we-online.de, ComponentLink2Description=Datasheet, ComponentLink2URL=https://www.we-online.com/catalog/datasheet/62000621821.pdf, Gender="Socket Header", Manufacturer Part Number=62000621821, Mounting Technology=THT, Orientation=Vertical, Packaging=Tube, Pin Number=6, Pitch=2mm, Published Date="May 2020", Row Number=Dual
J3 J4: library part "2mm Male 3x2 Right", "2mm Male 3x2 Right", Contact Resistance=20mOhm, Manufacturer="Wurth Elektronik", Manufacturer Part Number=62000621821, Operating Temperature="-40 to +105degC", Rated Current=2A, Withstanding Voltage=500VAC, Working Voltage=250VAC, ComponentLink1Description=Manufacturer, ComponentLink1URL=http://www.we-online.de, ComponentLink2Description=Datasheet, ComponentLink2URL=https://www.we-online.com/catalog/datasheet/62000621821.pdf, Gender="Socket Header", Mounting Technology=THT, Orientation=Vertical, Packaging=Tube, Pin Number=6, Pitch=2mm, Published Date="May 2020", Row Number=Dual
J5: "CONN HEADER SMD 5POS 1MM", Current Rating (Amps)=0.7A, Insulation Color=Natural, Manufacturer="JST Sales America Inc.", Material Flammability Rating="UL94 V-0", Operating Temperature="-25°C ~ 85°C", Supplier Part Number 1=455-1791-1-ND, Voltage Rating=50V, ComponentLink1Description=Datasheet, ComponentLink1URL=http://www.jst-mfg.com/product/pdf/eng/eSR.pdf, ComponentLink2Description="DigiKey Link", ComponentLink2URL=http://digikey.com/product-detail/en/jst-sales-america-inc/BM05B-SRSS-TB-LF-SN/455-1791-1-ND/926862, Connector Type=Header, Contact Finish - Mating=Tin, Contact Finish - Post=Tin, Contact Material="Copper Alloy", Contact Shape=Square, Contact Type="Male Pin", Fastening Type=Push-Pull, Features="Solder Retention", Insulation Height="0.167\" (4.25mm)", Insulation Material="Polyamide (PA), Nylon", LastUpdated="1/12/2020 10:14:00 PM", Lifecycle Status=Active, Minimum Order=1, Mounting Type="Surface Mount", Number of Positions=5, Number of Positions Loaded=All, Number of Rows=1, Packaging=TapeAndReel, Part Number=BM05B-SRSS-TB(LF)(SN), Part Status=Active, PartId=18, Pitch - Mating="0.039\" (1.00mm)", Price=0.35, Series=SR, Shrouding="Shrouded - 4 Wall", Style="Board to Cable/Wire", Supplier 1=DigiKey, Termination=Solder
L1: library part MLP2520S4R7ST0S1, "FIXED IND 4.7UH 1A 110 MOHM SMD", Current Rating (Amps)=1A, DC Resistance (DCR)="143mOhm Max", Device Package="1008 (2520 Metric)", Inductance Frequency - Test=2MHz, Manufacturer="TDK Corporation", Operating Temperature="-40°C ~ 125°C", Supplier Part Number 1=445-6378-1-ND, Tolerance=±20%, ComponentLink1Description=Datasheet, ComponentLink1URL=https://product.tdk.com/info/en/catalog/datasheets/inductor_commercial_power_mlp2520_en.pdf?ref_disty=digikey, ComponentLink2Description="DigiKey Link", ComponentLink2URL=http://digikey.com/product-detail/en/tdk-corporation/MLP2520S4R7ST0S1/445-6378-1-ND/2465705, Height - Seated (Max)="0.039\" (1.00mm)", Inductance=4.7µH, LastUpdated="13-Aug-20 11:03:40 AM", Lifecycle Status=Active, Material - Core=Ferrite, Minimum Order=1, Mounting Type="Surface Mount", Package / Case="1008 (2520 Metric)", Packaging=TapeAndReel, Part Number=MLP2520S4R7ST0S1, Part Status=Active, PartId=3467, Price=0.14, Series=MLP, Shielding=Shielded, Size / Dimension="0.098\" L x 0.079\" W (2.50mm x 2.00mm)", Supplier 1=DigiKey, Supplier Device Package="1008 (2520 Metric)", Type=Multilayer
P10: "WR-PHD Pin Header, THT, pitch 2mm, Single Row, Vertical, 4p", Contact Resistance=20mOhm, Manufacturer="Wurth Elektronik", Operating Temperature="-40 to +105degC", Rated Current=2A, Withstanding Voltage=500VAC, Working Voltage=200VAC, ComponentLink1Description=Manufacturer, ComponentLink1URL=http://www.we-online.de, ComponentLink2Description=Datasheet, ComponentLink2URL=https://www.we-online.com/catalog/datasheet/62000411121.pdf, Gender="Pin Header", Manufacturer Part Number=62000411121, Mounting Technology=THT, Orientation=Vertical, Packaging=Bag, Pin Number=4, Pitch=2mm, Published Date="May 2020", Row Number=Single
Q1 Q2 Q3 Q4 Q5 Q6: "N-FET"
R1: library part RK73B3ATTE473J, "RES 47K OHM 5% 1W 2512", Device Package="2512 (6432 Metric)", Manufacturer="KOA Speer Electronics, Inc.", Operating Temperature="-55°C ~ 155°C", Power (Watts)=1W, Ratings=AEC-Q200, Supplier Device Package=2512, Supplier Part Number 1=2019-RK73B3ATTE473JCT-ND, Temperature Coefficient=±200ppm/°C, Tolerance=±5%, ComponentLink1Description=Datasheet, ComponentLink1URL=http://www.koaspeer.com/catimages/Products/RK73B/RK73B.pdf, ComponentLink2Description="DigiKey Link", ComponentLink2URL=http://digikey.com/product-detail/en/koa-speer-electronics-inc/RK73B3ATTE473J/2019-RK73B3ATTE473JCT-ND/10425370, Composition="Thick Film", Features="Automotive AEC-Q200, Moisture Resistant", Height - Seated (Max)="0.028\" (0.70mm)", LastUpdated="21-Jan-20 4:26:21 AM", Lifecycle Status=Active, Minimum Order=1, Number of Terminations=2, Package / Case="2512 (6432 Metric)", Packaging=TapeAndReel, Part Number=RK73B3ATTE473J, Part Status=Active, Price=0.04, Resistance="47 kOhms", Series=RK73B, Size / Dimension="0.248\" L x 0.122\" W (6.30mm x 3.10mm)", Supplier 1=DigiKey
R2 R3 R4 R5 R6 R7 R11 R12 R13 R14 R15 R16 R18 R19 R20 R21 R22 R23 R24 R25 R26 R28 R29 R30 R37 R38 R39 R40 R41 R42 R43 R44 R45 R46 R47 R48: library part RK73H1ETTP1432F, "RES 14.3K OHM 1% 1/10W 0402", Device Package="0402 (1005 Metric)", Manufacturer="KOA Speer Electronics, Inc.", Operating Temperature="-55°C ~ 155°C", Power (Watts)="0.1W, 1/10W", Ratings=AEC-Q200, Resistance="14.3 kOhms", Supplier Device Package=0402, Supplier Part Number 1=2019-RK73H1ETTP1432FCT-ND, Temperature Coefficient=±100ppm/°C, Tolerance=±1%, ComponentLink1Description=Datasheet, ComponentLink1URL=http://www.koaspeer.com/catimages/Products/RK73H/RK73H.pdf, ComponentLink2Description="DigiKey Link", ComponentLink2URL=https://www.digikey.com/en/products/detail/koa-speer-electronics-inc/RK73H1ETTP1432F/9844351, Composition="Thick Film", Features="Automotive AEC-Q200, Moisture Resistant", Height - Seated (Max)="0.016\" (0.40mm)", LastUpdated="8/14/2022 9:23:49 PM", Lifecycle Status=Active, Minimum Order=1, Number of Terminations=2, Package / Case="0402 (1005 Metric)", Packaging=CutTape, Part Number=RK73H1ETTP1432F, Part Status=Active, PartId=10193, Price=0.01, Series=RK73H, Size / Dimension="0.039\" L x 0.020\" W (1.00mm x 0.50mm)", Supplier 1=DigiKey
R8 R31 R36: library part PCAN0805E2002BST5, "RES SMD 20K OHM 0.1% 1W 0805", Device Package="0805 (2012 Metric)", Manufacturer="Vishay Thin Film", Operating Temperature="-55°C ~ 155°C", Power (Watts)=1W, Resistance="20 kOhms", Supplier Device Package=0805, Supplier Part Number 1=764-1242-1-ND, Temperature Coefficient=±25ppm/°C, Tolerance=±0.1%, ComponentLink1Description=Datasheet, ComponentLink1URL=http://www.vishay.com/docs/60125/pcan.pdf, ComponentLink2Description="DigiKey Link", ComponentLink2URL=http://digikey.com/product-detail/en/vishay-thin-film/PCAN0805E2002BST5/764-1242-1-ND/6003316, Composition="Thin Film", Features="Flame Proof, Moisture Resistant, Safety", Height - Seated (Max)="0.018\" (0.46mm)", LastUpdated="8/26/2022 12:02:22 PM", Lifecycle Status=Active, Minimum Order=1, Number of Terminations=2, Package / Case="0805 (2012 Metric)", Packaging=TapeAndReel, Part Number=PCAN0805E2002BST5, Part Status=Active, PartId=32096, Price=0.59, Series=PCAN, Size / Dimension="0.080\" L x 0.050\" W (2.03mm x 1.27mm)", Supplier 1=DigiKey
R10: library part RNCF0603DTE1K00, "RES 1K OHM 0.5% 1/10W 0603", Device Package="0603 (1608 Metric)", Manufacturer="Stackpole Electronics Inc", Operating Temperature="-55°C ~ 155°C", Power (Watts)="0.1W, 1/10W", Ratings=AEC-Q200, Supplier Device Package=0603, Supplier Part Number 1=RNCF0603DTE1K00CT-ND, Temperature Coefficient=±25ppm/°C, Tolerance=±0.5%, ComponentLink1Description=Datasheet, ComponentLink1URL=https://www.seielect.com/catalog/sei-rncf.pdf, ComponentLink2Description="DigiKey Link", ComponentLink2URL=http://digikey.com/product-detail/en/stackpole-electronics-inc/RNCF0603DTE1K00/RNCF0603DTE1K00CT-ND/9915086, Composition="Thin Film", Features="Automotive AEC-Q200", Height - Seated (Max)="0.022\" (0.55mm)", LastUpdated="21-Jan-20 12:14:28 AM", Lifecycle Status=Active, Minimum Order=1, Number of Terminations=2, Package / Case="0603 (1608 Metric)", Packaging=TapeAndReel, Part Number=RNCF0603DTE1K00, Part Status=Active, PartId=26300, Price=0.05, Resistance="1 kOhms", Series=RNCF, Size / Dimension="0.061\" L x 0.031\" W (1.55mm x 0.80mm)", Supplier 1=DigiKey
U1: "3 Phase Gate Driver 1.5-2.2A", Package="VSON-10 Texas Instruments", Availability=Warning, DigiKey-Purchase-URL=https://snapeda.com/shop?store=DigiKey&id=3625400, MF="Texas Instruments", MP=UCC27282DRCR, Price=None, SnapEDA_Link=https://www.snapeda.com/parts/UCC27282DRCR/Texas%20Instruments/view-part/3625400/?ref=snap, Texas_Instruments-Purchase-URL=https://snapeda.com/shop?store=Texas+Instruments&id=3625400
U2 U3 U4: library part DRV5011
U6: "PIC32MK Microcontroller IC 32-Bit 120MHz 1MB _1M x 8_ FLASH 64-TQFP _10x10_", Package="TQFP-64 Microchip", Digi-Key_Part_Number=PIC32MK1024MCF064-I/PT-ND, Digi-Key_Purchase_URL=https://www.digikey.kr/product-detail/en/microchip-technology/PIC32MK1024MCF064-I-PT/PIC32MK1024MCF064-I-PT-ND/7164902?utm_source=snapeda&utm_medium=aggregator&utm_campaign=symbol, MF=Microchip, MP=PIC32MK1024MCF064-I/PT, SnapEDA_Link=https://www.snapeda.com/parts/PIC32MK1024MCF064-I/PT/Microchip/view-part/876704/?ref=snap
U7: "11-V, 1-A H-bridge motor driver 8-WSON -40 to 85", Package="WSON-8 Texas Instruments", Availability=Good, DigiKey-Purchase-URL=https://snapeda.com/shop?store=DigiKey&id=617854, MF="Texas Instruments", Mouser-Purchase-URL=https://snapeda.com/shop?store=Mouser&id=617854, MP=DRV8837CDSGR, Price=None, SnapEDA_Link=https://www.snapeda.com/parts/DRV8837CDSGR/Texas%20Instruments/view-part/617854/?ref=snap, Texas_Instruments-Purchase-URL=https://snapeda.com/shop?store=Texas+Instruments&id=617854
U8: "ADJ step down Buck"
U9 U10: "Current sense amplifier 2 channel"

## Free pads (board coordinates)
  round 0 hole 3 unplated: 1(-8,0) 1(0,-9.5) 1(0,9.5) 1(8,0)
  round 0 hole 2.1 unplated: 1(-6.9,-6.9) 1(-6.9,6.9) 1(6.9,-6.9) 1(6.9,6.9)
  round 0 hole 8 unplated: 1(0,0)
  round 5 hole 3 unplated: 1(0,42) 1(37,37) 1(42,0)
  rrect50% 3x3 smd: 2(15.1,-4.1) 2(15.1,0) 2(15.1,4.1)

## Via types
v1: diameter 0.45, hole 0.3, Top Layer to Bottom Layer, tented both sides, 170 vias
v2: diameter 0.7, hole 0.35, Top Layer to Bottom Layer, tented both sides, 44 vias
v3: diameter 0.7, hole 0.35, Top Layer to Bottom Layer, tented bottom, 24 vias

## Nets (pads, with @x,y where several pads share a name; then routed paths per layer and width w, separated by ;. In a path a pad name is that pad's centre, name@x,y a point inside that pad or via, vN(x,y) a via of type N, cw(c..) or ccw(c..) an arc to the next point about the centre after c; other vN are vias at no path point)
3V3: C3.1 C4.1 C5.1 C7.2 C8.2 C9.2 C20.2 C21.2 C22.2 C23.2 C24.2 C27.2 C31.2 C32.2 C37.1 C38.1 ICSP1.2 L1.2 P10.4 R4.1 R5.1 R6.1 R10.1 R11.2 R16.2 R18.1 R22.1 R23.1 R29.1 U2.1 U3.1 U4.1 U5.8 U5.13 U6.10 U6.19 U6.26 U6.34 U6.35 U6.38 U6.57 U7.8 U9.8 U10.8 | length 76
  Top Layer w0.254: R6.1 -15.525,-8.965 -15.525,-7.893 -14.532,-6.9 U4.1 ; C5.1 -12.836,-6.235 -12.836,-6.295 -12.974,-6.266 U4.1@-14.028,-6.633 ; v1(1.14,14.3) C3.1@1.202,14.362 ; U2.1 1.205,15.935 1.205,14.365 C3.1@1.202,14.362 ; R4.1 2.537,14.362 C3.1@1.202,14.362 ; v1(5,29.975) 5,31.4 5.367,31.767 5.827,31.767 v1(6,31.94) 6.02,31.94 6.193,32.113 6.193,32.551 6.342,32.7 U5.13 ; U5.8 9.998,33.473 9.998,33.959 10.314,34.275 10.314,34.354 10.64,34.68 v1(10.64,34.7) ; v1(10.1,20.94) 10.1,21.4 ; U6.38 10.285,21.215 10.1,21.4 ; U6.35 10.185,22.715 10.1,22.8 ; U6.34 10.515,23.215 10.1,22.8 ; C4.1 12.38,-8.233 13.221,-9.075 U3.1 13.523,-9.401 15.109,-9.401 R5.1 ; v1(14.675,27.6) v1(14.675,26.6) 14.675,25.942 14.687,25.93 14.687,25.773 v1(14.86,25.6) 14.997,25.463 14.997,24.403 U6.26 ; U6.57 16,14.54 v1(16.14,14.4) ; U6.19 18.503,24.403 18.503,25.463 v1(18.64,25.6) ; U6.10 20.188,20.718 21.278,20.718 v1(21.4,20.84) 21.43,20.87 22.395,20.87 v1(22.425,20.9) ; v1(22.8,25.825) 22.813,25.812 C27.2@23.847,25.812 ; U7.8 23.774,26.75 23.787,26.737 23.787,25.873 C27.2@23.847,25.812 ; v1(23.86,25.8) C27.2@23.847,25.812 ; U10.8 29.35,4.989 29.363,5.002 29.722,5.002 30.18,5.46 v1(30.2,5.46) ; U9.8 29.755,8.415 30.107,8.767 30.107,8.787 30.28,8.96 v1(30.3,8.96) ; U4.1 -14.296,-6.9 U4.1@-14.028,-6.633 ; U4.1 U4.1@-14.028,-6.633 ; 10.1,21.4 10.1,22.8
  Layer 2 w0.4: v1(5,29.975) 5,30.94 v1(6,31.94) 6,34.5 7,35.5 10.2,35.5 12.5,33.2 12.5,26.2 ; 21.2,18 23.4,18 31.1,10.3 31.1,8.9 ; v1(30.2,5.46) 31.1,6.36 31.1,8.9 ; v1(30.3,8.96) 31.04,8.96 31.1,8.9
  other v1: -7.1,16.34 -6.1,16.34 -6.96,17.7 -6.8,18.7 6.8,19.1 39.868,25.6
BRAKE_SWITCH: R16.1 U6.31 | length 9.8
  Top Layer w0.127: R16.1 5,28.75 5.236,28.513 5.312,28.513 7.525,26.3 11.3,26.3 12.5,25.1 U6.31
BSTA: C2.1 D3.1 U1.20 | length 5.9
  Top Layer w0.254: U1.20 21.008,12.978 21.008,14.248 C2.1 21.16,14.951 21.309,15.1 22.319,15.1 23.077,14.342 23.077,13.273 23.35,13 D3.1
BSTB: C17.1 D4.1 U1.17 | length 2.7
  Top Layer w0.254: U1.17 22.193,11.793 23.653,11.793 C17.1 24.785,11.84 24.8,11.825 D4.1
BSTC: C19.1 D5.1 U1.14 | length 2.9
  Top Layer w0.254: U1.14 23.235,10.285 23.68,9.84 C19.1 23.873,9.667 24,9.667 24.042,9.625 24.7,9.625 D5.1
DEBUG_LED: R28.1 U6.64 | length 3.1
  Top Layer w0.127: U6.64 19.53,15.5 v1(20,15.5)
  Layer 2 w0.127: v1(20,15.5) 20.3,15.8 v1(22.425,15.8)
ENC.A: J5.3 U6.51 | length 15.6
  Top Layer w0.127: U6.51 13,14.787 13.1,14.687 v1(13.1,14.6)
  Layer 1 w0.127: v1(0,18.337) 4.955,18.337 5.792,17.5 10.2,17.5 v1(13.1,14.6)
ENC.B: J5.4 U6.50 | length 13.7
  Top Layer w0.127: v1(12.4,14.6) 12.4,14.687 12.5,14.787 U6.50
  Layer 1 w0.127: v1(1,17.8) 4.9,17.8 5.484,17.216 9.784,17.216 v1(12.4,14.6)
ENC.I: J5.5 U6.44 | length 10.5
  Top Layer w0.127: J5.5 2,17.912 2.236,17.675 7.625,17.675 7.9,17.4 10.2,17.4 10.4,17.6 10.4,18 10.563,18.163 11.263,18.163 U6.44
GHA: R2.1 U1.19 | length 8.8
  Top Layer w0.254: U1.19 21.508,12.978 21.508,13.555 21.6,13.647 v1(21.6,13.7)
  Bottom Layer w0.254: v1(21.6,13.7) 23.3,12 23.8,12 25.181,10.619 25.8,10 R2.1
GHB: R7.1 U1.16 | length 5.1
  Top Layer w0.254: U1.16 22.193,11.293 22.893,11.293 v1(22.9,11.3)
  Bottom Layer w0.254: v1(22.9,11.3) 22.9,10.5 24.8,8.6 R7.1
GHC: R15.1 U1.13 | length 3.1
  Top Layer w0.254: U1.13 22.48,9.785 22.599,9.666 22.834,9.666 v1(22.9,9.6)
  Bottom Layer w0.254: v1(22.9,9.6) 23.8,8.7 R15.1
GLA: R3.1 R37.1 U1.11 | length 2.8
  Top Layer w0.254: U1.11 21.008,9.092 21.008,8.542 21.8,7.75 R3.1 R37.1
GLB: R14.1 R38.1 U1.10 | length 2.5
  Top Layer w0.254: R38.1 R14.1 R14.1@20.8,7.75 ; R14.1@20.5,7.7 U1.10
GLC: R30.1 R39.1 U1.9 | length 3.3
  Top Layer w0.254: R39.1 R30.1 18.8,7.75 19.154,8.104 19.154,8.304 19.782,8.304 20.001,8.523 20.001,9.096 U1.9@20.003,9.097
GND: C1.1 C3.2 C4.2 C5.2 C8.1 C9.1 C10.1 C11.2 C12.1 C13.1 C14.2 C15.2 C16.2 C18.1 C20.1 C21.1 C22.1 C23.1 C24.1 C25.2 C26.2 C27.1 C28.2 C29.1 C30.1 C31.1 C32.1 C33.1 C34.1 C35.2 C36.2 C37.2 C38.2 D1.2 D2.2 ICSP1.3 J1.1 J1.3 J1.5 J2.1 J2.3 J2.5 J3.2 J3.4 J3.6 J4.2 J4.4 J4.6 J5.2 P5.1 P10.3 pad.1@0,42 pad.1@37,37 pad.1@42,0 R8.1 R21.2 R31.1 R36.1 R37.2 R38.2 R39.2 R46.1 R47.1 R48.1 U1.6 U1.25 U2.2 U3.2 U4.2 U5.1 U5.9 U5.11 U5.18 U5.25 U6.9 U6.20 U6.25 U6.41 U6.56 U6.65 U7.4 U7.9 U8.1 U9.2 U9.4 U9.6 U9.9 U10.2 U10.4 U10.5 U10.6 U10.9 UART.1 | length 63
  Top Layer w0.254: v2(-14.6,17.1) -14.34,17.36 v1(-13.2,17.36) -13.15,17.31 v1(-11.7,17.31) ; U4.2 -13.393,-7.732 C5.2@-12.455,-7.181 ; C5.2@-12.38,-7.109 C5.2 ; v1@-11.7,17.3 -10.4,17.3 -10.25,17.45 v1(-10.25,17.978) U8.1 ; R21.2 -8.07,15.43 -7.13,15.43 C8.1 C9.1 ; v1(-1,18.337) -0.827,18.165 -0.827,17.362 -0.128,16.663 0,16.663 0,14.58 0.26,14.32 C3.2 ; v1(6,31.06) 6.02,31.06 6.193,30.887 6.193,30.739 ; 6.194,30.738 6.194,30.406 6.4,30.2 U5.18 ; v1(7.36,28.4) 7.36,30.152 7.312,30.2 U5.18 ; U5.25@7.948,30.248 7.248,30.248 U5.18 ; v1(8.1,34.56) 8.12,34.56 8.45,34.23 U5.11 U5.25@8.45,32.2 ; U5.25@8.738,31.238 cw(c9.25,30.726) v1(9.142,31.442) cw(c9.25,30.726) U5.25@9.25,31.45 ; U5.25@9.45,31.7 U5.9 9.45,34.37 9.76,34.68 v1(9.76,34.7) ; v1(10.1,20.06) 10.12,20.06 10.465,19.715 U6.41 ; U5.25@10.452,30.248 11.152,30.248 U5.1 ; C4.2 12.89,-6.131 13.393,-7.733 U3.2 ; v1(15.26,14.4) 15.26,14.42 15.5,14.66 U6.56 ; U6.25 15.503,24.403 15.503,24.903 15.648,25.048 15.648,25.488 C22.1@15.74,25.58 ; v1(17.3,9.76) 17.325,9.785 U1.6 19,9.785 v1(20.25,11.035) ; v1(17.76,25.6) 17.76,25.58 18,25.34 U6.20 ; U6.9 21.125,20.215 21.38,19.96 v1(21.4,19.96) 21.46,19.9 22.36,19.9 v1(22.42,19.84) ; U7.9@24.6,27.479 24.912,27.167 C27.1@24.912,25.8 ; v1(24.7,27.5) 24.7,27.85 25.087,28.237 25.672,28.237 U7.4 ; v1(24.74,25.8) C27.1@24.912,25.8 ; v1(25.86,25.8) C27.1@24.912,25.8 ; U10.5 27.85,5.5 28.075,5.725 v1(28.075,5.975) ; U10.4@27.85,6.935 27.857,6.928 27.857,6.372 27.927,6.302 27.927,6.223 28.1,6.05 28.15,6.05 28.225,5.975 U10.9@28.575,5.975 ; U9.4 27.863,10.372 27.863,9.787 28.1,9.55 v1(28.1,9.4) ; U10.6 28.35,5.75 U10.9@28.575,5.975 ; U9.6 28.35,9.15 U9.9 28.85,9.65 U9.2 ; U10.2 U10.9@28.85,6.1 ; v1(29,9.4) 29,9.45 29.273,9.723 30.183,9.723 v1(30.3,9.84) ; v1(30.2,6.34) 30.083,6.223 29.223,6.223 v1(28.975,5.975) U10.9@28.85,6.1 ; U10.9@28.575,5.975 28.825,6.225 28.825,6.125 U10.9@28.85,6.1
  Bottom Layer w0.8: C16.2 -17.052,21.323 -17.052,21.924 -17.05,21.926 J2.1 ; C10.1@-17.325,-0.9 -17.05,-1.175 J1.5 ; C12.1 -8.85,-12.955 -8.525,-12.63 J3.2 ; C14.2 21.523,-12.632 22.998,-12.632 J4.2
  other v1: 18.6,-7.9 19.5,-7.9 20.4,-7.9 18.6,-7 19.5,-7 20.4,-7 14.2,-2 15.1,-2 16,-2 14.2,2.1 15.1,2.1 16,2.1 17.8,6.525 19.8,6.525 22.8,6.525 10.7,8.625 12.7,8.625 14.7,8.625 19.485,10.285 21,10.27 21.015,11.785 19.5,11.8 -8.1,15.41 -7.1,15.47 -6.1,15.47 8.86,15.8 26.45,15.8 21.7,16.6 -11.05,17.31 17.8,17.83 13.615,17.915 8.86,18 15.75,19.965 21.9,22 17.885,22.015 13.7,22.1 21.4,23.7 39.868,24.6 15.74,25.6 8.284,30.584 10,30.584 8.284,32.3 10,32.3
  other v2: 0,-5.3 -5,-5 5,-5 26,-1.5 26.8,-1.5 27.6,-1.5 -4.7,0 4.7,0 26,0.5 26.8,0.5 27.6,0.5 -5,5 5,5 0,5.3 -11.7,9.9 -10.6,11.2 -12.1,11.4 -11.4,12.6 -9.7,12.6
  other v3: 42,-2 40.7,-1.5 43.4,-1.4 40,-0.1 44,-0.1 40.5,1.2 43.4,1.3 42,2 37,35 35.7,35.5 38.4,35.6 35,36.9 39,36.9 35.5,38.2 38.4,38.3 37,39 0,40 -1.3,40.5 1.4,40.6 -2,41.9 2,41.9 -1.5,43.2 1.4,43.3 0,44
GU_H: Q1.4 R2.2 | length 8.8
  Top Layer w0.254: v1(20.879,2.614) 20.884,2.62 21.495,2.62 Q1.4
  Layer 2 w0.254: v1(20.879,2.614) 20.879,4.779 22.1,6 23.3,6 24.304,7.004 25.321,7.004 v1(25.8,6.525)
GU_L: Q4.4 R3.2 | length 5.7
  Top Layer w0.254: Q4.4 v1(20.4,2.13)
  Layer 2 w0.254: v1(20.4,2.13) 20.4,5.125 v1(21.8,6.525)
GV_H: Q2.4 R7.2 | length 11.7
  Top Layer w0.254: v1(21.5,-2.2) Q2.4
  Layer 2 w0.254: v1(21.5,-2.2) 21.5,4.7 22.4,5.6 23.6,5.6 24.488,6.488 24.763,6.488 v1(24.8,6.525)
GV_L: Q5.4 R14.2 | length 9.9
  Top Layer w0.254: Q5.4 v1(20.4,-1.97)
  Layer 2 w0.254: v1(20.4,-1.97) 19.8,-1.37 19.8,5.525 v1(20.8,6.525)
GW_H: Q3.4 R15.2 | length 18.4
  Top Layer w0.254: v1(21.5,-6.3) Q3.4
  Layer 2 w0.254: v1(21.5,-6.3) 21.5,-3.15 22,-2.65 22,4.5 22.7,5.2 24.014,5.2 24.514,5.7 v1(25.8,5.7)
  Bottom Layer w0.254: R15.2 23.8,6.45 24.55,5.7 v1(25.8,5.7)
GW_L: Q6.4 R30.2 | length 14
  Top Layer w0.254: Q6.4 v1(20.4,-6.07)
  Layer 2 w0.254: v1(18.8,6.525) 19.3,6.025 19.3,-4.97 v1(20.4,-6.07)
HALL_OUT1: C11.1 R24.2 U6.48 | length 4.4
  Top Layer w0.127: U6.48 11.315,15.565 10.639,14.889 9.964,14.889 R24.2 ; C11.1 C11.1@9.875,13.935 ; C11.1 C11.1@9.875,13.935 ; C11.1 C11.1@9.875,13.935 ; C11.1@9.875,13.935 R24.2 ; R24.2 10.064,14.989 R24.2
HALL_OUT1_R: R4.2 R24.1 U2.3 | length 15.1
  Top Layer w0.127: U2.3 -1.27,14.37 -0.553,13.653 2.953,13.653 3.4,14.1 3.4,15.716 ; R4.2@2.6,15.65 R4.2 2.741,15.716 3.4,15.716 ; R24.1 8.625,14.7 6,14.7 4.984,15.716 3.4,15.716
HALL_OUT2: C35.1 R25.2 U6.43 | length 2.6
  Top Layer w0.127: C35.1 9.875,18.135 R25.2 10.458,19 10.694,18.764 11.266,18.764 U6.43
HALL_OUT2_R: R5.2 R25.1 U3.3 | length 32
  Top Layer w0.127: v1(8.1,18) 8.14,18.04 8.14,18.491 8.65,19 R25.1
  Top Layer w0.254: U3.3 14.491,-6.925 15.687,-8.121 R5.2
  Layer 2 w0.127: v1(8.1,18) 8.1,9.6 10.2,7.5 10.2,-4.6 12.233,-6.633 14.224,-6.633 U3.3
HALL_OUT3: C36.1 R26.2 U6.46 | length 3
  Top Layer w0.127: U6.46 10.494,17.215 10.425,17.146 10.296,17.146 9.95,16.8 R26.2 C36.1@9.875,15.935 ; C36.1 C36.1@9.875,15.935 ; C36.1 C36.1@9.875,15.935 ; C36.1 C36.1@9.875,15.935
HALL_OUT3_R: R6.2 R26.1 U4.3 | length 43
  Top Layer w0.254: R6.2 -14.729,-9.97 -13.685,-9.367 U4.3
  Layer 1 w0.254: U4.3 -13.026,-9.1 -11.5,-7.574 -11.5,6.7 -4.5,13.7 5.625,13.7 v1(8.725,16.8)
HBRIDGE_IN1: U6.53 U7.6 | length 21.4
  Top Layer w0.127: v1(13.8,14.6) 13.8,14.687 14,14.887 U6.53 ; v1(19.8,25.6) 21.95,27.75 U7.6
  Layer 1 w0.127: v1(13.8,14.6) 14.8,15.6 18.3,15.6 19.8,17.1 v1(19.8,25.6)
HBRIDGE_IN2: U6.54 U7.5 | length 21.7
  Top Layer w0.127: v1(14.5,14.6) U6.54 ; v1(19.9,26.3) 21.85,28.25 U7.5
  Layer 1 w0.127: v1(14.5,14.6) 15.2,15.3 18.5,15.3 20.216,17.016 20.216,25.984 v1(19.9,26.3)
HBRIDGE_OUT1: R1.1 U7.2 | length 7.1
  Top Layer w0.254: U7.2 29.875,27.25 v1(31.9,25.225)
HBRIDGE_OUT2: R1.2 U7.3 | length 7.8
  Top Layer w0.254: U7.3 28.075,27.75 v1(31.9,31.575)
HBRIDGE_SLEEP: R29.2 U7.7 | length 1.1
  Top Layer w0.254: R29.2 22.8,27.05 22.987,27.237 23.702,27.237 U7.7
IMU_CPOUT: C34.2 U5.20 | length 1.2
  Top Layer w0.254: C34.2 8.413,28.573 8.413,28.705 8.45,28.742 U5.20
IMU_INT: U5.12 U6.30 | length 12.4
  Top Layer w0.127: v1(7.4,33.4) 7.925,33.4 U5.12 ; v1(9.4,28.6) 10.7,27.3 10.9,27.3 13,25.2 U6.30
  Layer 2 w0.127: v1(7.4,33.4) 7.4,29.9 8.7,28.6 v1(9.4,28.6)
IMU_REGOOUT: C33.2 U5.10 | length 2.5
  Top Layer w0.254: C33.2 8.273,35.267 8.533,35.267 8.95,34.85 U5.10
ISNS_U: U6.12 U9.1 | length 17.3
  Top Layer w0.127: U6.12 21.597,21.715 21.922,21.39 24.291,21.39 29.35,16.332 U9.1
ISNS_V: U6.14 U9.7 | length 23.5
  Top Layer w0.127: U6.14 23.385,22.715 30.9,15.2 30.9,8.5 30.1,7.7 29.066,7.7 28.85,7.916 U9.7
ISNS_W: U6.15 U10.1 | length 23.7
  Top Layer w0.127: U6.15 23.285,23.215 31.2,15.3 31.2,8.3 29.785,6.885 U10.1
MCLR: C25.1 ICSP1.1 R11.1 U6.7 | length 31.8
  Top Layer w0.127: U6.7 v1@21.5,19.215 ; v1(21.5,19) v1@21.5,19.215 ; R11.1 23.575,19.675 22.86,18.96 C25.1 22.38,18.96 22.125,19.215 v1@21.5,19.215 ; v1(25.7,21.6) 26.1,22 41,22 41.3,22.3 41.3,26.1 40.8,26.6 ICSP1.1